# Allegro board DEV_SUB_AUDIO_BRD_V1_1-20170606-163.brd
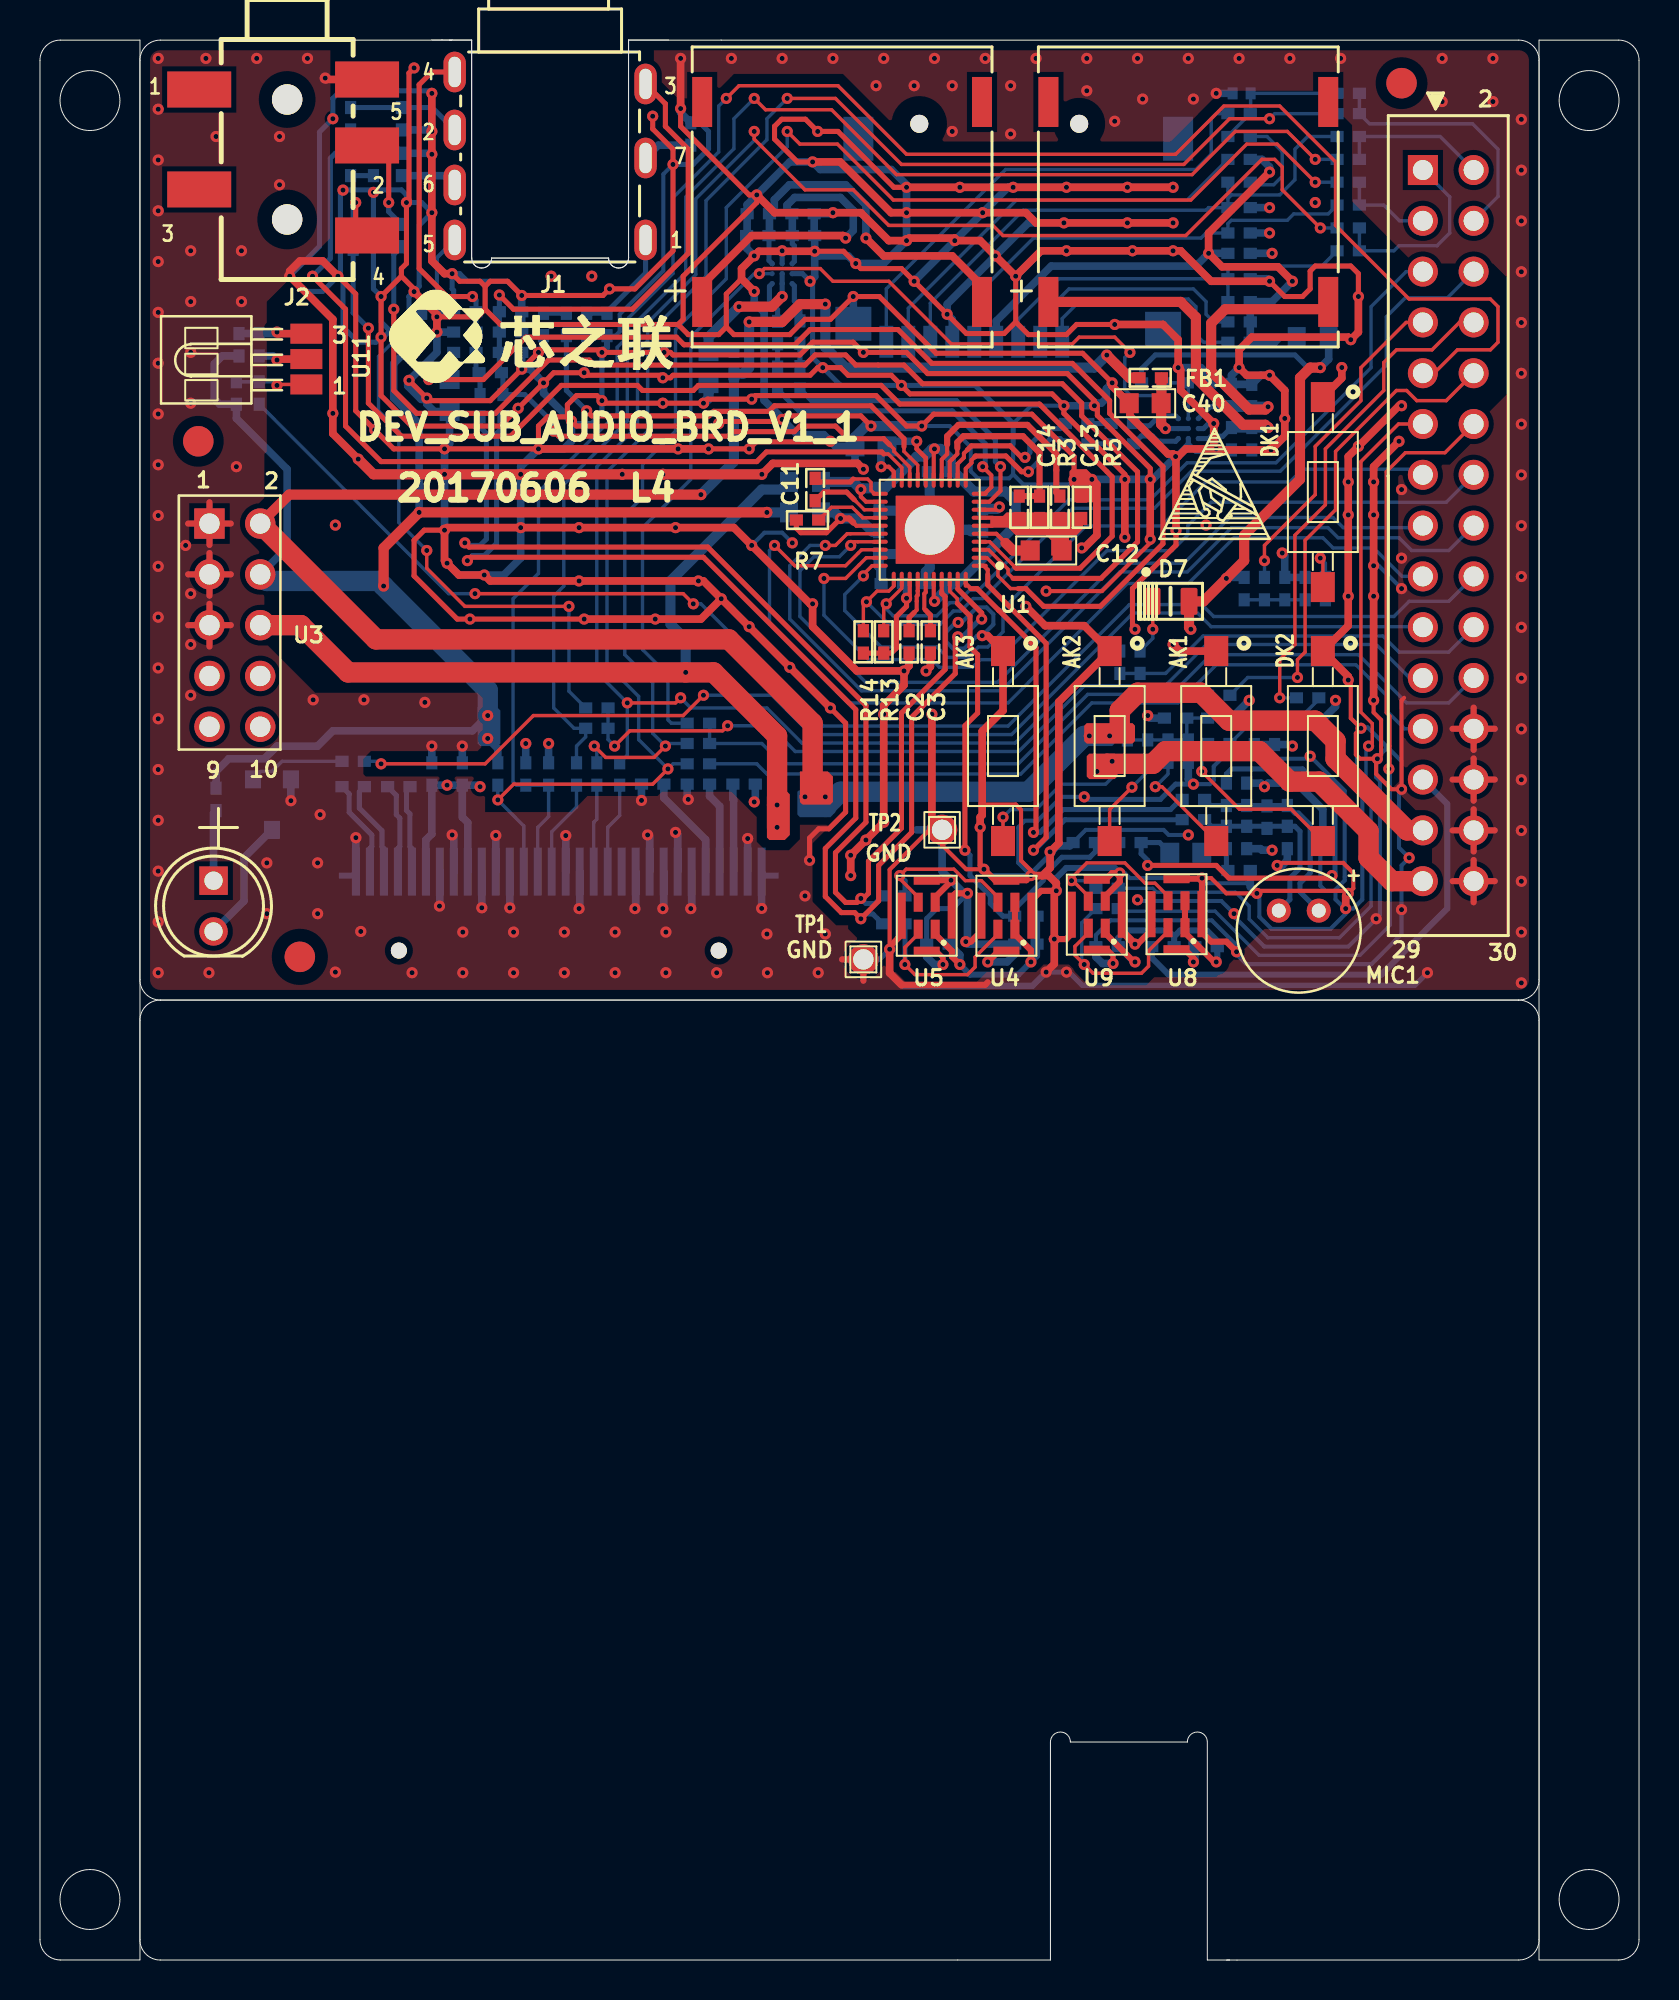
[diagram p0: board, top side]
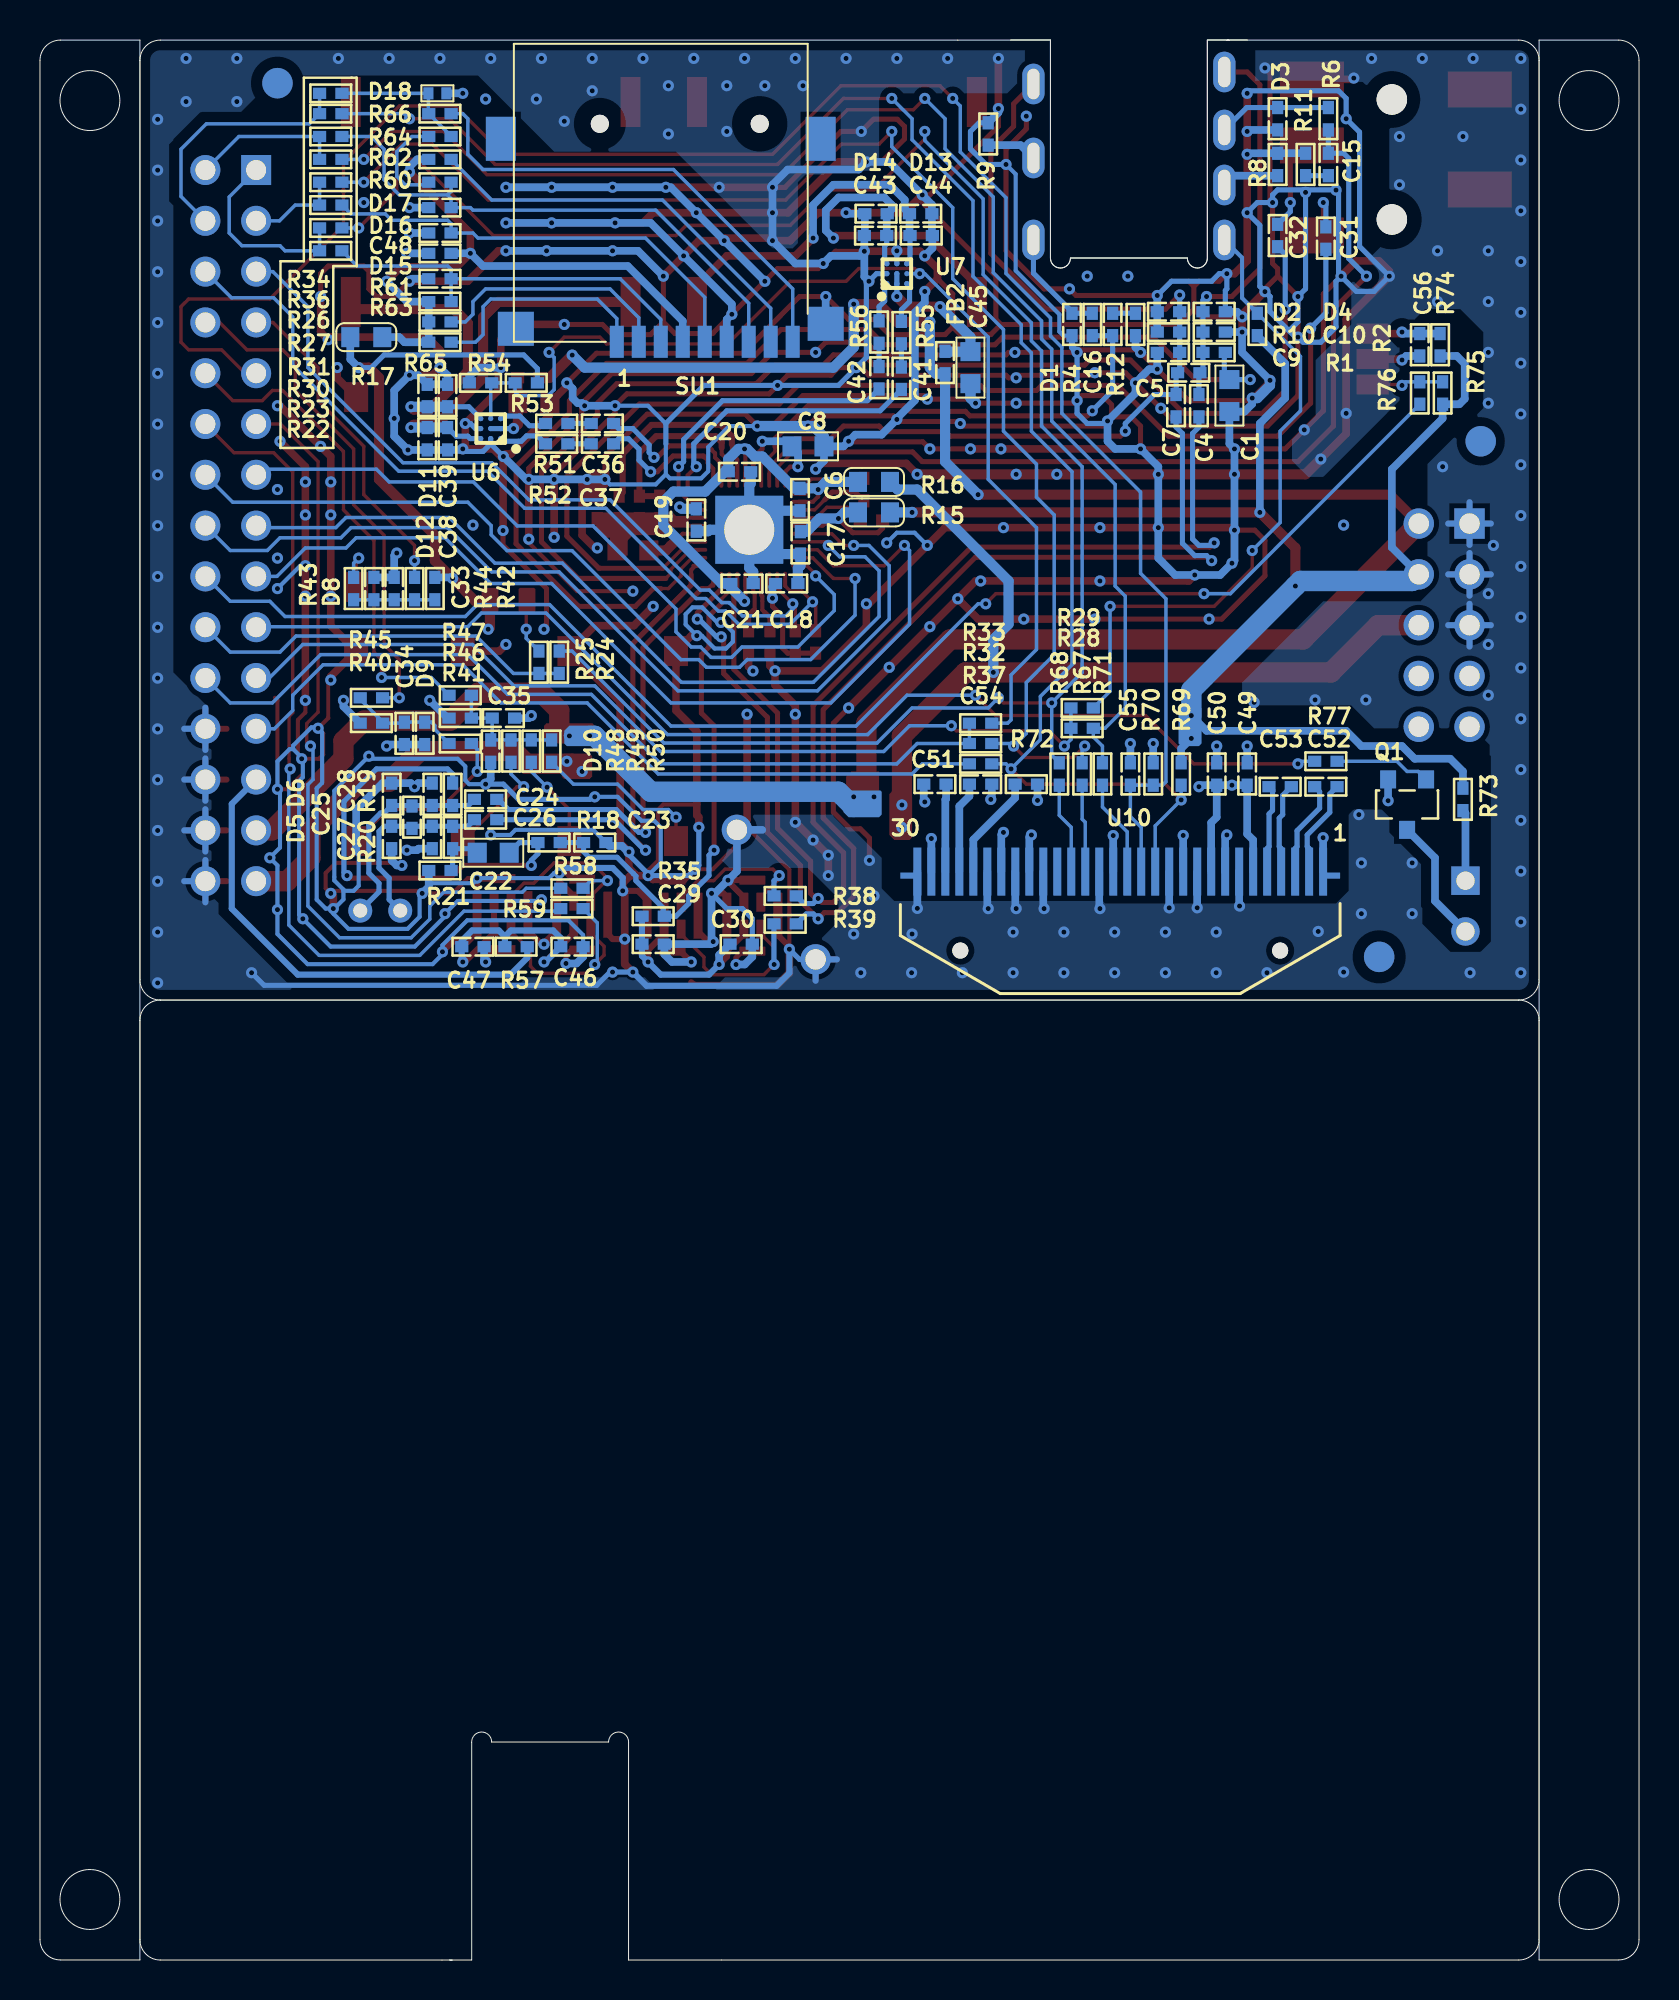
[diagram p1: board, bottom side, seen from below]

Outline 80 x 96.01 mm; copper layers: TOP, GND02, PWR03, BOTTOM. Coordinates in mm from the lower left corner of the outline.
Outline path: circle c2.5,92.98 r1.5 ; circle c2.5,3.03 r1.5 ; circle c77.5,92.98 r1.5 ; circle c77.5,3.03 r1.5 ; 0,94.99 0,1.02 arc(0.3,0.3) 1.02,0 5,0 5,96 1.02,96 arc(0.3,95.71) 0,94.99 ; 5,94.99 5,49.02 arc(5.3,48.3) 6.02,48 73.98,48 arc(74.7,48.3) 75,49.02 75,94.99 arc(74.7,95.71) 73.98,96 29.45,96 29.45,85.1 arc(28.95,84.6) 28.45,85.1 22.6,85.1 arc(22.1,84.6) 21.6,85.1 21.6,96 20.49,96 20.62,96 6.02,96 arc(5.3,95.71) 5,94.99 ; 5,46.98 5,1.02 arc(5.3,0.3) 6.02,0 50.55,0 50.55,10.9 arc(51.05,11.4) 51.55,10.9 57.4,10.9 arc(57.9,11.4) 58.4,10.9 58.4,0 59.51,0 59.38,0 73.98,0 arc(74.7,0.3) 75,1.02 75,46.98 arc(74.7,47.7) 73.98,48 6.02,48 arc(5.3,47.7) 5,46.98 ; 75,96 75,0 78.98,0 arc(79.7,0.3) 80,1.02 80,94.99 arc(79.7,95.71) 78.98,96 75,96

## Design rules (mm)
net group DIFFMIC1: nets MIC1N MIC1P
net group DIFFPAIR0: nets DMICCLK DMICDAT
net group DIFFSPOL: nets SPOLN SPOLP
net group DIFFSPOR: nets SPORN SPORP
net group N16787119: nets N16787119 N16787301
net group N16787121: nets N16787121 N16787268
net group N16787152: nets N16787152 N16787188
net group N16787225: nets N16787225 N16787227
net group N16787399: nets N16787379 N16787399
net group N16787436: nets N16787436 N16787450
net group N16812335: nets N16812333 N16812335
net group N16812341: nets N16812341 N16812343

## Placement (name value [footprint] x y rotation side)
AK1  -  [KEY-2]  58.85 60.7 270 top
AK2  -  [KEY-2]  53.51 60.7 270 top
AK3  -  [KEY-2]  48.18 60.7 270 top
C1  10uF  [C0603]  20.49 78.23 90 bottom
C2  2.2uF  [C0402]  43.48 65.91 270 top
C3  2.2uF  [C0402]  44.55 65.91 270 top
C4  NC-104  [C0402]  22.02 77.72 90 bottom
C5  33pF  [C0402]  22.53 79.37 180 bottom
C6  2.2uF  [C0402]  41.97 73.03 270 bottom
C7  NC-104  [C0402]  23.16 77.72 90 bottom
C8  10uF  [C0603]  41.58 75.69 180 bottom
C9  NC/33pF  [C0402]  23.54 80.39 180 bottom
C10  NC/33pF  [C0402]  21.26 81.4 0 bottom
C11  2.2uF  [C0402]  38.78 73.53 90 top
C12  10uF  [C0603]  50.34 70.48 180 top
C13  1uF  [C0402]  51.02 72.64 90 top
C14  4.7uF  [C0402]  48.99 72.64 270 top
C15  104  [C0402]  15.54 89.79 90 bottom
C16  104  [C0402]  26.34 81.78 270 bottom
C17  1uF  [C0402]  41.96 70.86 90 bottom
C18  1uF  [C0402]  42.64 68.83 0 bottom
C19  1uF  [C0402]  47.16 72.01 90 bottom
C20  1uF  [C0402]  45 74.42 0 bottom
C21  1uF  [C0402]  44.88 68.83 0 bottom
C22  10uF  [C0603]  57.32 55.37 180 bottom
C23  1uF  [C0402]  52.24 55.88 0 bottom
C24  104  [C0402]  57.7 58.04 0 bottom
C25  10pF  [C0402]  61.39 57.15 90 bottom
C26  104  [C0402]  57.7 57.02 0 bottom
C27  33pF  [C0402]  60.37 56.13 90 bottom
C28  33pF  [C0402]  60.37 58.29 270 bottom
C29  10uF  [C0402]  49.32 50.8 0 bottom
C30  104  [C0402]  44.92 50.8 0 bottom
C31  1uF  [C0402]  15.67 86.1 270 bottom
C32  1uF  [C0402]  18.08 86.23 270 bottom
C33  104  [C0402]  62.28 68.58 270 bottom
C34  104  [C0402]  61.77 61.34 90 bottom
C35  104  [C0402]  56.82 62.1 0 bottom
C36  104  [C0402]  51.86 76.83 180 bottom
C37  104  [C0402]  51.86 75.82 180 bottom
C38  22pF  [C0402]  59.61 76.07 90 bottom
C39  22pF  [C0402]  59.61 78.23 270 bottom
C40  10uF  [C0603]  55.29 77.85 0 top
C41  104  [C0402]  36.9 79.09 270 bottom
C42  104  [C0402]  38.02 79.12 270 bottom
C43  22pF  [C0402]  38.2 86.23 180 bottom
C44  22pF  [C0402]  35.91 86.23 0 bottom
C45  10uF  [C0603]  33.45 79.63 90 bottom
C46  10uF  [C0402]  53.39 50.67 0 bottom
C47  104  [C0402]  58.34 50.67 0 bottom
C48  104  [C0402]  59.99 85.34 180 bottom
C49  1uF-NC  [C0402]  19.6 59.31 270 bottom
C50  1uF-NC  [C0402]  21.13 59.31 270 bottom
C51  4.7uF-NC  [C0402]  35.23 58.8 180 bottom
C52  1uF-NC  [C0402]  15.67 58.67 180 bottom
C53  1uF-NC  [C0402]  17.95 58.67 180 bottom
C54  4.7uF-NC  [C0402]  32.94 58.8 0 bottom
C55  4.7uF-NC  [C0402]  25.45 59.31 270 bottom
C56  104  [C0402]  10.97 80.77 90 bottom
CN1  Speaker  [SPK_SMD]  57.45 88.16 90 top
CN2  Speaker  [SPK_SMD]  40.13 88.16 90 top
D1  AU0511P1  [C0402]  28.37 81.78 270 bottom
D2  AU0511P1  [C0402]  23.54 82.42 0 bottom
D3  AU0511P1  [C0402]  18.08 92.07 270 bottom
D4  AU0511P1  [C0402]  21.26 82.42 180 bottom
D5  AU0511P1  [C0402]  62.4 56.13 270 bottom
D6  AU0511P1  [C0402]  62.4 58.29 90 bottom
D7  RED  [LED0805]  56.56 67.94 0 top
D8  ESD9B5VL-2/TR  [C0402]  63.29 68.58 90 bottom
D9  ESD9B5VL-2/TR  [C0402]  60.75 61.34 270 bottom
D10  ESD9B5VL-2/TR  [C0402]  57.45 60.45 270 bottom
D11  AU0511P1  [C0402]  60.63 78.23 90 bottom
D12  AU0511P1  [C0402]  60.63 76.07 270 bottom
D13  AU0511P1  [C0402]  35.94 87.32 180 bottom
D14  AU0511P1  [C0402]  38.17 87.32 0 bottom
D15  ESD9B5VL-2/TR  [C0402]  59.99 84.07 0 bottom
D16  ESD9B5VL-2/TR  [C0402]  59.99 86.36 0 bottom
D17  ESD9B5VL-2/TR  [C0402]  59.99 87.63 0 bottom
D18  ESD9B5V-2/TR  [TVS0402]  60.12 93.34 180 bottom
D19  IR_TX  [IR-LED]  8.68 53.97 0 top
DK1  -  [KEY-2]  64.18 73.4 270 top
DK2  -  [KEY-2]  64.18 60.7 270 top
FB1  600R-100M  [L0402]  55.55 79.12 180 top
FB2  600R-100M  [L0402]  34.72 79.88 270 bottom
J1  A_JACK  [HP_JACK]  25.45 96.01 0 top
J2  JACK  [PJ327F]  12.37 96.03 270 top
MIC1  Micphone  [MIC_600X270]  62.23 52.47 0 top
NOREF  -  [unnamed]  13 50.16 0 top
NOREF#2  -  [#2]  73.88 48 0 top
NOREF#3  -  [#2]  5 0 90 top
NOREF#4  -  [#2]  0 14.06 0 top
NOREF#5  -  [#2]  75 4.33 0 top
NOREF#6  -  [#2]  5 0 0 top
NOREF#7  -  [unnamed]  68.12 93.85 0 top
NOREF#8  -  [#2]  2.9 94.43 0 top
NOREF#9  -  [#2]  5 3.45 0 top
NOREF#10  -  [#2]  5 48 90 top
NOREF#11  -  [#2]  5 1.02 0 top
NOREF#12  -  [unnamed]  7.92 75.94 0 top
NOREF#13  -  [unnamed]  13 50.16 180 bottom
NOREF#14  -  [unnamed]  7.92 75.94 180 bottom
NOREF#15  -  [unnamed]  68.12 93.85 180 bottom
Q1  BSN20  [SOT-23]  11.6 57.78 270 bottom
R1  2k  [R0402]  21.26 80.39 180 bottom
R2  100k  [R0402]  19.1 81.78 270 bottom
R3  220K 1%  [R0402]  50.01 72.64 90 top
R4  0R  [R0402]  27.35 81.78 270 bottom
R5  0R 1%  [R0402]  52.12 72.64 270 top
R6  0R  [R0402]  15.54 92.07 270 bottom
R7  2k  [R0402]  38.4 72.01 0 top
R8  0R  [R0402]  18.08 89.79 270 bottom
R9  0R  [R0402]  32.56 91.31 270 bottom
R10  0R  [R0402]  23.54 81.4 180 bottom
R11  22R  [R0402]  16.68 89.79 270 bottom
R12  22R  [R0402]  25.19 81.78 90 bottom
R13  2k  [R0402]  42.21 65.91 90 top
R14  2k  [R0402]  41.19 65.91 90 top
R15  0R  [R0603]  38.27 72.39 180 bottom
R16  0R  [R0603]  38.27 73.91 180 bottom
R17  0R  [R0603]  63.67 81.15 180 bottom
R18  1K  [R0402]  54.53 55.88 0 bottom
R19  1K5  [R0402]  59.36 58.29 90 bottom
R20  1K5  [R0402]  59.36 56.13 90 bottom
R21  1K  [R0402]  59.99 54.48 180 bottom
R22  0R  [R0402]  65.45 85.47 0 bottom
R23  0R  [R0402]  65.45 86.61 0 bottom
R24  NC-0R  [R0402]  54.02 64.89 270 bottom
R25  NC-2K  [R0402]  55.04 64.89 270 bottom
R26  0R  [R0402]  65.45 91.18 0 bottom
R27  0R  [R0402]  65.45 90.04 0 bottom
R28  NC-0R  [R0402]  27.86 61.59 0 bottom
R29  0R  [R0402]  27.86 62.61 0 bottom
R30  0R  [R0402]  65.45 87.75 0 bottom
R31  0R  [R0402]  65.45 88.9 0 bottom
R32  NC-0R  [R0402]  32.94 60.83 0 bottom
R33  NC-0R  [R0402]  32.94 61.85 0 bottom
R34  0R  [R0402]  65.45 93.34 0 bottom
R35  0R  [R0402]  49.32 52.19 180 bottom
R36  0R  [R0402]  65.45 92.33 0 bottom
R37  NC-0R  [R0402]  32.94 59.81 0 bottom
R38  0R  [R0402]  42.72 53.21 0 bottom
R39  0R  [R0402]  42.72 51.81 0 bottom
R40  10K-NC  [R0402]  63.42 61.85 180 bottom
R41  0R  [R0402]  58.97 60.83 180 bottom
R42  10K-NC  [R0402]  60.24 68.58 270 bottom
R43  0R  [R0402]  64.31 68.58 90 bottom
R44  0R-NC  [R0402]  61.26 68.58 270 bottom
R45  0R-NC  [R0402]  63.42 63.12 0 bottom
R46  10K  [R0402]  58.97 62.1 0 bottom
R47  0R-NC  [R0402]  58.97 63.24 0 bottom
R48  1k8  [R0402]  56.43 60.45 90 bottom
R49  4k7  [R0402]  55.42 60.45 90 bottom
R50  10K  [R0402]  54.4 60.45 90 bottom
R51  51K  [R0402]  54.15 76.83 180 bottom
R52  51K  [R0402]  54.15 75.82 180 bottom
R53  NC-0R  [R0402]  55.67 78.86 180 bottom
R54  100k  [R0402]  57.96 78.86 180 bottom
R55  51K  [R0402]  36.9 81.38 270 bottom
R56  51K  [R0402]  38.02 81.4 270 bottom
R57  0R  [R0402]  56.18 50.67 180 bottom
R58  0R  [R0402]  53.39 53.59 180 bottom
R59  0R  [R0402]  53.39 52.57 180 bottom
R60  10K  [R0402]  59.99 88.9 180 bottom
R61  10K  [R0402]  59.99 82.93 180 bottom
R62  10K  [R0402]  59.99 90.04 180 bottom
R63  10K  [R0402]  59.99 81.91 180 bottom
R64  47K  [R0402]  59.99 91.18 180 bottom
R65  10K  [R0402]  59.99 80.9 180 bottom
R66  NC-0R  [R0402]  59.99 92.33 180 bottom
R67  100R-NC  [R0402]  27.86 59.31 270 bottom
R68  100R-NC  [R0402]  29 59.31 270 bottom
R69  10K-NC  [R0402]  22.91 59.31 270 bottom
R70  10K-NC  [R0402]  24.3 59.31 270 bottom
R71  100R-NC  [R0402]  26.84 59.31 270 bottom
R72  910K-NC  [R0402]  30.65 58.8 180 bottom
R73  1K  [R0402]  8.81 58.04 90 bottom
R74  33R  [R0402]  9.95 80.77 270 bottom
R75  10K  [R0402]  9.83 78.36 270 bottom
R76  0R-NC  [R0402]  10.97 78.36 270 bottom
R77  1K  [R0402]  15.67 59.94 0 bottom
SU1  MICROSD/TF_SLOT  [TF9P]  48.94 91.82 0 bottom
TP1  GND  [TP_PAD]  41.19 50.03 0 top
TP2  GND  [TP_PAD]  45.13 56.51 0 top
U1  AC100  [QFN40P0_40B5_00X5_00H0_75]  44.51 71.52 180 top
U2  DIP-30  [IDC-30]  70.46 71.73 270 top
U3  DIP-10  [IDC-10]  9.75 66.75 0 top
U4  NSM0411DT-BL-ZR  [SON8P0_6B4_0X3_0H1_0]  48.35 52.22 0 top
U5  NSM0411DT-BL-ZR  [SON8P0_6B4_0X3_0H1_0]  44.36 52.22 0 top
U6  AW8010CSR  [BGA9P0_50B1_43X1_43H0_70]  57.45 76.58 0 bottom
U7  AW8010CSR  [BGA9P0_50B1_43X1_43H0_70]  37.13 84.32 90 bottom
U8  NSM0411DT-BL-ZR  [SON8P0_6B4_0X3_0H1_0]  56.86 52.3 0 top
U9  NSM0411DT-BL-ZR  [SON8P0_6B4_0X3_0H1_0]  52.87 52.27 0 top
U10  OLED  [LED_128X64]  25.95 54.23 0 bottom
U11  IR_RX  [IR]  10.16 74.77 90 top

## Library data of the parts
AK1-AK3 DK1 DK2 = KEY-2
C1 C4 C5 C7 C9 C10 = CAPACITOR: room: HP_JACK
C2 C3 C6 C8 C11-C14 = CAPACITOR_0: room: AC100
C15 C16 = CAPACITOR_0: room: HP_JACK
C17-C21 = CAPACITOR_0: room: POWER
C22-C28 = CAPACITOR: room: ECM-AMIC
C29 C30 C46 C47 = CAPACITOR: room: MEMS-DMIC
C31 C32 = CAPACITOR: room: LINE-IN
C33-C35 C49-C56 = CAPACITOR_0
C36-C39 = CAPACITOR: room: SPK-U4
C40 = CAPACITOR_0: room: SPK-U4
C41-C44 = CAPACITOR: room: SPK-U5
C45 = CAPACITOR_0: room: SPK-U5
C48 = CAPACITOR_0: room: site1
CN1 = SPEAKER_1: room: SPK-U4
CN2 = SPEAKER_1: room: SPK-U5
D1-D4 = 1_1.5KE100A: room: HP_JACK
D5 D6 = 1_1.5KE100A: room: ECM-AMIC
D7 = LED_1: Tolerance: RichardLC; User Part Number: LED0805
D8-D10 D18 = 1_1.5KE100A
D11 D12 = 1_1.5KE100A: room: SPK-U4
D13 D14 = 1_1.5KE100A: room: SPK-U5
D15-D17 = 1_1.5KE100A: room: site1
D19 = IR_TX
FB1 = INDUCTOR_2: room: SPK-U4
FB2 = INDUCTOR_2: room: SPK-U5
J1 = A_JACK
J2 = HP_JACK: room: LINE-IN
MIC1 = Micphone_0: room: ECM-AMIC
Q1 = NMOS_0
R1 R2 R4 R6 = R: room: HP_JACK
R3 R5 R7 R13 R14 = R: room: AC100
R8-R12 = R1 0805: room: HP_JACK
R15-R17 R22-R34 R36 R37 = R1_0805
R18-R21 = R: room: ECM-AMIC
R35 R38 R39 R57-R59 = R: room: MEMS-DMIC
R40-R50 = R1 0805
R51-R54 = R: room: SPK-U4
R55 R56 = R: room: SPK-U5
R60-R63 R65 = R: room: site1
R64 R73-R77 = R
R66 = R1_0805: room: site1
R67-R72 = R1_0805: room: DRAM
SU1 = SDMMC SLOT_11: room: site1
TP1 TP2 = T_POINT_R: room: MEMS-DMIC
U1 = AXP22x_24
U2 = DIP-30
U3 = DIP-10
U4 U5 U8 U9 = DMIC6/SMD_0: room: MEMS-DMIC
U6 = AW8010CSR: Tolerance: RichardLC; room: SPK-U4
U7 = AW8010CSR: Tolerance: RichardLC; room: SPK-U5
U10 = OLED_1
U11 = IR_Module_0

## Footprints (pads in the part's own frame, mm; a bottom-side part is the same pattern mirrored in y, then rotated)
BGA9P0_50B1_43X1_43H0_70
  round 0.26 smd: A1(-0.5,0.5) A2(0,0.5) A3(0.5,0.5) B1(-0.5,0) B2(0,0) B3(0.5,0) C1(-0.5,-0.5) C2(0,-0.5) C3(0.5,-0.5)
C0402
  rect 0.66x0.56 smd: 1(-0.56,0) 2(0.56,0)
C0603
  rect 0.95x1 smd: 1(-0.8,0) 2(0.8,0)
HP_JACK
  oval 1.118x2.032 hole 0.61x1.524: 1(4.85,-10) 2(-4.7,-4.5) 3(4.85,-2.2) 4(-4.7,-1.6) 5(-4.7,-10) 6(-4.7,-7.25) 7(4.85,-5.9)
IDC-10
  rect 1.52x1.52 hole 1.02: 1(-1.27,5.08)
  round 1.52 hole 1.02: 2(1.27,5.08) 3(-1.27,2.54) 4(1.27,2.54) 5(-1.27,0) 6(1.27,0) 7(-1.27,-2.54) 8(1.27,-2.54) 9(-1.27,-5.08) 10(1.27,-5.08)
IDC-30
  rect 1.5x1.5 hole 1: 1(-17.78,-1.27)
  round 1.5 hole 1: 2(-17.78,1.27) 3(-15.24,-1.27) 4(-15.24,1.27) 5(-12.7,-1.27) 6(-12.7,1.27) 7(-10.16,-1.27) 8(-10.16,1.27) 9(-7.62,-1.27) 10(-7.62,1.27) 11(-5.08,-1.27) 12(-5.08,1.27) 13(-2.54,-1.27) 14(-2.54,1.27) 15(0,-1.27) 16(0,1.27) 17(2.54,-1.27) 18(2.54,1.27) 19(5.08,-1.27) 20(5.08,1.27) 21(7.62,-1.27) 22(7.62,1.27) 23(10.16,-1.27) 24(10.16,1.27) 25(12.7,-1.27) 26(12.7,1.27) 27(15.24,-1.27) 28(15.24,1.27) 29(17.78,-1.27) 30(17.78,1.27)
IR
  rect 1x1.6 smd: 1(4.01,-3.17) 2(5.28,-3.17) 3(6.55,-3.17)
IR-LED
  rect 1.422x1.422 hole 0.914: 1(0,0)
  round 1.422 hole 0.914: 2(0,-2.54)
KEY-2
  rect 1.5x1.2 smd: 1(-4.75,0) 2(4.75,0)
L0402
  rect 0.66x0.56 smd: 1(-0.56,0) 2(0.56,0)
LED0805
  custom 0.84x1.34 smd: A(0.925,0) C(-0.925,0)
LED_128X64
  round 0.8 hole 0.8 unplated: (-8,3.75) (8,3.75)
  rect 0.4x2.4 smd: 1(-10.15,-0.2) 2(-9.45,-0.2) 3(-8.75,-0.2) 4(-8.05,-0.2) 5(-7.35,-0.2) 6(-6.65,-0.2) 7(-5.95,-0.2) 8(-5.25,-0.2) 9(-4.55,-0.2) 10(-3.85,-0.2) 11(-3.15,-0.2) 12(-2.45,-0.2) 13(-1.75,-0.2) 14(-1.05,-0.2) 15(-0.35,-0.2) 16(0.35,-0.2) 17(1.05,-0.2) 18(1.75,-0.2) 19(2.45,-0.2) 20(3.15,-0.2) 21(3.85,-0.2) 22(4.55,-0.2) 23(5.25,-0.2) 24(5.95,-0.2) 25(6.65,-0.2) 26(7.35,-0.2) 27(8.05,-0.2) 28(8.75,-0.2) 29(9.45,-0.2) 30(10.15,-0.2)
MIC_600X270
  round 1.2 hole 0.7: 1(1.75,0) 2(-0.25,0)
PJ327F
  round 1.52 hole 1.6 unplated: (3,0) (9,0)
  rect 1.8x3.2 smd: 1(2.5,-4.4) 2(5.3,4) 3(7.5,-4.4) 4(9.8,4) 5(2,4)
QFN40P0_40B5_00X5_00H0_75
  custom 0.8x0.2 smd: 1(-2.5,1.8) 2(-2.5,1.4) 3(-2.5,1) 4(-2.5,0.6) 5(-2.5,0.2) 6(-2.5,-0.2) 7(-2.5,-0.6) 8(-2.5,-1) 9(-2.5,-1.4) 10(-2.5,-1.8) 21(2.5,-1.8) 22(2.5,-1.4) 23(2.5,-1) 24(2.5,-0.6) 25(2.5,-0.2) 26(2.5,0.2) 27(2.5,0.6) 28(2.5,1) 29(2.5,1.4) 30(2.5,1.8)
  custom 0.2x0.8 smd: 11(-1.8,-2.5) 12(-1.4,-2.5) 13(-1,-2.5) 14(-0.6,-2.5) 15(-0.2,-2.5) 16(0.2,-2.5) 17(0.6,-2.5) 18(1,-2.5) 19(1.4,-2.5) 20(1.8,-2.5) 31(1.8,2.5) 32(1.4,2.5) 33(1,2.5) 34(0.6,2.5) 35(0.2,2.5) 36(-0.2,2.5) 37(-0.6,2.5) 38(-1,2.5) 39(-1.4,2.5) 40(-1.8,2.5)
  rect 3.4x3.4 hole 2.5: 41(0,0)
R0402
  rect 0.66x0.56 smd: 1(-0.56,0) 2(0.56,0)
R0603
  rect 0.9x1 smd: 1(-0.8,0) 2(0.8,0)
SON8P0_6B4_0X3_0H1_0
  rect 0.45x0.95 smd: 1(0.425,-0.675) 2(0.425,0.675) 3(-0.425,0.675) 4(-0.425,-0.675)
  rect 1.3x0.45 smd: 5(0,-1.775) 7(0,1.775)
  rect 0.45x2.3 smd: 6(1.275,0) 8(-1.275,0)
SOT-23
  rect 0.9x0.8 smd: 1(-1.254,0.95) 2(-1.254,-0.95) 3(1.27,0)
SPK_SMD
  rect 2.5x1 smd: (4.75,7) (4.75,-7) 1(-5.25,-7) 2(-5.25,7)
TF9P
  rect 1.5x2.2 smd: (-8,0.75) (8,0.75)
  round 0.9 hole 0.9 unplated: (-4.95,0) (3.05,0)
  rect 1.8x1.7 smd: (7.25,10.25) 10(-8.25,10)
  rect 0.7x1.6 smd: 1(2.2,10.9) 2(1.1,10.9) 3(0,10.9) 4(-1.1,10.9) 5(-2.2,10.9) 6(-3.3,10.9) 7(-4.4,10.9) 8(-5.5,10.9) 9(-6.6,10.9)
TP_PAD
  round 1.52 hole 1.02: 1(0,0)
TVS0402
  rect 0.5x0.6 smd: 1(-0.45,0) 2(0.45,0)
unnamed
  round 1.524 smd: 1(0,0)

## Nets
AVCC: C17.2 C18.2 C19.2 R7.1 R13.1 R14.1 R15.1 U1.8(AVCC) U1.25(VCC-IO0) U1.33(VCC-IO1)
GND: AK1.1 AK2.1 AK3.1 C1.1 C2.2 C3.2 C6.2 C8.2 C9.1 C10.1 C17.1 C18.1 C19.1 C20.1 C21.1 C23.1 C27.1 C28.1 C29.1 C30.1 C33.1 C34.1 C35.1 C38.1 C39.1 C40.1 C43.1 C44.1 C45.1 C46.1 C47.1 C48.1 C49.1 C50.1 C51.1 C54.1 C55.1 C56.1 D1.2(CATHODE) D2.2(CATHODE) D3.2(CATHODE) D4.2(CATHODE) D5.2(CATHODE) D6.2(CATHODE) D8.2(CATHODE) D9.2(CATHODE) D10.2(CATHODE) D11.2(CATHODE) D12.2(CATHODE) D13.2(CATHODE) D14.2(CATHODE) D15.2(CATHODE) D16.2(CATHODE) D17.2(CATHODE) D18.2(CATHODE) DK1.1 DK2.1 J2.5(A) Q1.2(SOURCE) R5.1 R8.1 R9.1 R10.1 R11.1 R12.1 R21.1 R54.1 R72.2 SU1.6(VSS2) SU1.10(GND) TP1.1(TP) TP2.1(TP) U1.41(GND) U2.24 U2.26 U2.28 U2.30 U3.1 U3.3 U3.5 U4.5(GND1) U4.6(GND2) U4.7(GND3) U4.8(GND4) U5.2(L/R) U5.5(GND1) U5.6(GND2) U5.7(GND3) U5.8(GND4) U6.A2(GND0) U6.B3(GND1) U7.A2(GND0) U7.B3(GND1) U8.5(GND1) U8.6(GND2) U8.7(GND3) U8.8(GND4) U9.2(L/R) U9.5(GND1) U9.6(GND2) U9.7(GND3) U9.8(GND4) U10.1(NC1) U10.7(NC2) U10.8(VSS) U10.10(NC3) U10.11(BS1) U10.12(BS2) U10.16(R/W) U10.17(E/RD) U10.21(D3) U10.22(D4) U10.23(D5) U10.24(D6) U10.25(D7) U10.29(NC4) U10.30(NC5) U11.2(GND)
VCC-1V8: R16.2 U2.29 U3.6
VCC-3V3: C49.2 C50.2 D7.A(ANODE) R2.2 R15.2 R17.1 R40.1 R42.1 R46.2 R53.2 R57.2 R69.1 R70.1 R73.2 R74.2 R75.2 U2.25 U3.4 U10.6(VBAT) U10.9(VDD)
VCC-5V: FB1.2 FB2.2 U2.27 U3.2
VCC-CARD: C48.2 R17.2 R61.1 R62.1 R63.1 R65.1 SU1.4(VDD)
AKEY: R47.2 U2.10
CPVDD: C6.1 C20.2 C21.2 R16.1 U1.15(VPP) U1.22(CPVDD) U1.36(LDOIN)
DKEY1: R44.1 U2.7
DKEY2: R45.1 U2.8
DMIC_CLK: R58.1 U2.11
DMIC_DATA: R59.1 U2.12
DMICCLK: C4.1 R38.1 U1.37(MIC2P/DMICCLK)
DMICDAT: C7.1 R39.1 U1.39(MIC2N/DMICDAT)
HBIAS: C1.2 R1.2 U1.2(HBIAS)
HPOUTFB: C5.1 C7.2 C9.2 D2.1(ANODE) J1.3 R10.2 U1.18(HPOUTFB)
HPOUTL: C16.2 R4.2 U1.17(HPOUTL)
HPOUTR: C15.2 R6.2 U1.19(HPOUTR)
HS-MIC: C4.2 C5.2 C10.2 D4.1(ANODE) J1.4 R1.1
I2S_BCLK: U1.29(BCLK1) U2.14
I2S_DI: U1.27(SDOUT1) U2.15
I2S_DO: U1.26(SDIN1) U2.16
I2S_LRCLK: U1.28(LRCK1) U2.17
I2S_MCLK: U1.30(MCLK1) U2.13
IR-RX: R76.2 U2.18
IR-TX: R77.2 U2.19
IRQ-AUDIO: R7.2 U1.24(IRQ)
JDET: J1.5 R2.1 R29.1
LINEINL: C31.2 U1.4(LINEINL)
LINEINR: C32.2 U1.3(LINEINR)
MBIAS: C23.2 R18.1 R35.2 U1.38(MBIAS)
MIC1N: C26.1 U1.1(MIC1N)
MIC1P: C24.1 U1.40(MIC1P)
PA0: R22.2 R23.2 U2.1
PA1: R26.2 R27.2 U2.2
PA2: R30.2 R31.2 U2.3
PA3: R34.2 R36.2 U2.4
PA19: R24.2 R25.2 U2.20
PA20: R28.2 R29.2 U2.21
PA21: R32.2 R33.2 U2.22
PA22: R37.2 U2.23
PA-SHDN: R33.1 R53.1 R54.2 U6.C2(NSD) U7.C2(NSD)
RESET: C55.2 R70.2 U2.9 U10.14(RESET)
SD-CLK: D16.1(ANODE) R30.1 SU1.5(CLK)
SD-CMD: D15.1(ANODE) R22.1 R61.2 SU1.3(CMD)
SD-DATA0: D17.1(ANODE) R26.1 R60.2 SU1.7(DAT0)
SD-DET: D18.1(ANODE) R34.1 R64.2 R66.1
SPI1-CLK: R31.1 R32.1 R67.1
SPI1-CS0: R36.1 R37.1 R69.2 U10.13(CS)
SPI1-MISO: R27.1 R28.1 R71.1
SPI1-MOSI: R23.1 R24.1 R68.1
SPOLN: C36.2 U1.12(SPOLN)
SPOLP: C37.2 U1.11(SPOLP)
SPORN: C41.2 U1.10(SPORN)
SPORP: C42.2 U1.9(SPORP)
TWI0_SCL: R13.2 U1.32(SCK) U2.5
TWI0_SDA: R14.2 U1.31(SDA) U2.6
N15969012: C12.1 C13.1 C14.2 R3.1 R5.2 U1.6(VRN) U1.7(AGND)
N15969050: C14.1 R3.2 U1.13(VRA2)
N15969220: C11.1 U1.23(CPP)
N15969224: C8.1 U1.16(VEE) U1.20(CPVEE)
N15969254: C11.2 U1.21(CPN)
N15969394: C12.2 U1.5(VRP)
N15969722: C13.2 U1.14(VRA1)
N16778267: D1.1(ANODE) J1.1 R4.1
N16778279: D3.1(ANODE) J1.2 R6.1
N16778304: C16.1 R12.2
N16778306: C15.1 R11.2
N16779575: C29.2 C30.2 R35.1 U4.1(VDD) U4.2(L/R) U5.1(VDD)
N16779577: R39.2 U4.4(DATA) U5.4(DATA)
N16779579: R38.2 U4.3(CLK) U5.3(CLK)
N16779775: C22.2 R18.2 R19.2
N16779786: C22.1 R20.1 R21.2
N16779788: C24.2 C25.2 C28.2 D6.1(ANODE) MIC1.1(+) R19.1
N16779792: C25.1 C26.2 C27.2 D5.1(ANODE) MIC1.2(-) R20.2
N16785918: C32.1 J2.2(B)
N16785920: C31.1 J2.4(D)
N16787119: C39.2 CN1.1(-) D11.1(ANODE) U6.C3(VO2)
N16787121: C44.2 CN2.1(-) D13.1(ANODE) U7.C3(VO2)
N16787152: R55.1 U7.C1(IN-)
N16787188: R56.1 U7.A1(IN+)
N16787225: C42.1 R56.2
N16787227: C41.1 R55.2
N16787229: C45.2 FB2.1 U7.B1(VDD) U7.B2(PVDD)
N16787268: C43.2 CN2.2(+) D14.1(ANODE) U7.A3(VO1)
N16787301: C38.2 CN1.2(+) D12.1(ANODE) U6.A3(VO1)
N16787324: C40.2 FB1.1 U6.B1(VDD) U6.B2(PVDD)
N16787379: R51.1 U6.C1(IN-)
N16787399: R52.1 U6.A1(IN+)
N16787436: C36.1 R51.2
N16787450: C37.1 R52.2
N16788404: C46.2 C47.2 R57.1 U8.1(VDD) U8.2(L/R) U9.1(VDD)
N16788406: R59.2 U8.4(DATA) U9.4(DATA)
N16788408: R58.2 U8.3(CLK) U9.3(CLK)
N16804148: C33.2 D8.1(ANODE) R42.2 R43.1 R44.2
N16804167: DK1.2 R43.2
N16804252: C34.2 D9.1(ANODE) R40.2 R41.1 R45.2
N16804271: DK2.2 R41.2
N16808923: R60.1 R64.1
N16812181: R67.2 U10.18(D0)
N16812183: R68.2 U10.19(D1)
N16812293: C54.2 U10.27(VCOM)
N16812303: R72.1 U10.26(IREF)
N16812329: C51.2 U10.28(VCC)
N16812333: C52.2 U10.2(C2P)
N16812335: C52.1 U10.3(C2N)
N16812341: C53.2 U10.4(C1P)
N16812343: C53.1 U10.5(C1N)
N16812349: R71.2 U10.15(D/C)
N16833864: C56.2 R74.1 U11.3(VCC)
N16833866: R75.1 R76.1 U11.1(OUT)
N16833898: D19.2 Q1.3(DRAIN)
N16833900: D19.1 R73.1
N16835930: Q1.1(GATE) R77.1
N16840291: AK1.2 R48.1
N16840665: AK2.2 R49.1
N16840727: AK3.2 R50.1
N16841036: D7.C(CATHODE) R25.1
N16845415: R66.2 SU1.9(CD#)
N16846101: R65.2 SU1.1(DAT2)
N16846106: R63.2 SU1.2(DAT3)
N16846113: R62.2 SU1.8(DAT1)
N16849635: C35.2 D10.1(ANODE) R46.1 R47.1 R48.2 R49.2 R50.2
N16850084: J1.7 R9.2
N16850111: J1.6 R8.2
N159690300: C2.1 U1.34(BYPASS)
N1596935626: C3.1 U1.35(VDD-CORE)

Pads without a net: J2 1 3; NOREF 1; NOREF#7 1; NOREF#12 1; NOREF#13 1; NOREF#14 1; NOREF#15 1; U3 7 8 9 10; U10 20

## Via types
v1: diameter 0.559, hole 0.254, TOP to BOTTOM, 469 vias

## Routing (per net, layer and track width the routed paths; a pad name or vN(x,y) marks a point on that pad's centre or on a via; arc(x,y) is an arc through that point)
AVCC: length 30.1
  TOP w0.203: v1(43.35,68.09) 43.51,68.25 U1.33 ; 40.69,71.88 40.85,71.72 U1.25 ; U1.8 47.85,72.52 v1(48,72.66)
  TOP w0.254: v1(43.35,68.09) 43.35,67.69 42.85,67.18 42.85,65.6 42.59,65.35 R13.1 R14.1 ; R7.1 37.84,71.6 38.07,71.37 39.34,71.37 v1(40.05,72.08)
  TOP w0.305: 40.69,71.88 40.48,72.08 v1(40.05,72.08)
  PWR03 w0.508: 43.35,68.45 42.08,69.72 42.08,71.37 41.37,72.08 v1(40.05,72.08) ; 43.35,68.45 44.24,69.34 46.4,69.34 48,70.93 v1(48,72.66) ; 43.35,68.45 v1(43.35,68.09)
  BOTTOM w0.305: 47.9,72.57 v1(48,72.66)
  BOTTOM w0.381: v1(43.35,68.09) 43.35,68.68 C18.2
  BOTTOM w0.508: C17.2 41.65,71.42 40.99,72.08 v1(40.05,72.08) 39.75,72.39 R15.1 ; C19.2 47.9,72.57
GND: length 1386.3
  TOP w0.203: v1(49.58,54.23) 49.58,54.48 49.08,54.97 49.08,57.51 48.81,57.78 47.14,57.78 ; v1(66.91,60.07) 66.04,60.07 65.83,60.27 65.83,61.34 v1(66.09,61.59) 65.58,62.1 65.58,63.88 v1(65.45,64) ; v1(66.91,60.07) 66.85,60.01 66.85,59.31 67.61,58.54 v1(68.12,58.54) 68.12,62.99 68.25,63.12 ; v1(66.91,60.07) 67.1,60.26 67.1,60.71 67.1,62.01 66.72,62.38 v1(66.72,62.99) ; 58.13,54.05 58.13,54.1 v1(58.14,54.1) 58.59,54.1 59.36,53.34 v1(60.88,53.34) 61.01,53.46 65.32,53.46 v1(65.45,53.34) 65.71,53.59 65.71,54.35 65.2,54.86 62.02,54.86 v1(61.9,54.73) ; v1(47.23,54.54) 46.34,54.54 45.13,55.75 TP2.1 44.5,56.51 42.51,54.52 42.51,50.67 ; v1(50.34,68.45) 53.13,68.45 55.55,70.87 v1(55.55,71.05)
  TOP w0.254: v1(32.05,92.58) 32.05,91.69 35.48,88.26 v1(35.86,88.26) 35.86,87.88 32.18,84.2 32.18,82.04 31.92,81.78 ; v1(14.91,84.2) 15.79,83.31 15.79,77.47 v1(16.75,76.51) 17.7,75.56 v1(20.24,75.56) v1(24.94,75.56) 24.94,76.7 25.4,77.16 26.39,77.16 ; 48.81,81.91 48.23,81.33 46.35,81.33 v1(45.39,82.29) v1(43.73,83.94) 43.1,84.58 41.07,84.58 v1(40.81,84.83) 40.2,85.44 v1(38.76,85.44) ; 48.81,81.91 49.45,81.28 51.35,81.28 51.86,81.78 v1(53.77,81.78) ; 48.81,81.91 v1(48.81,84.2) ; U5.5 44.85,50.44 45.18,50.12 v1(45.18,49.78) ; v1(61.51,83.94) 62.28,83.18 63.17,83.18 63.55,83.56 63.55,84.45 63.8,84.71 65.58,84.71 65.96,84.32 v1(65.96,83.18) ; 22.27,82.55 22.27,83.69 ; 22.27,82.55 21.89,82.17 v1(19.86,82.17) ; 22.27,82.55 23.03,81.78 31.92,81.78 ; 22.27,83.69 22.53,83.94 23.39,83.94 v1(24.1,83.23) 28.17,83.23 v1(28.49,83.56) 29.76,83.56 31.67,85.47 v1(31.67,89.79) 31.67,90.55 30.65,91.56 v1(30.65,92.2) ; 22.27,83.69 22.02,83.94 21,83.94 v1(20.62,84.32) ; v1(43.35,88.64) 42.72,88.64 39.92,91.44 v1(38.91,91.44) 38.3,92.05 37.11,92.05 36.75,91.69 36.75,91.06 37.89,89.91 v1(38.65,89.91) ; v1(51.74,74.04) 51.74,75.18 49.62,77.3 44.71,77.3 v1(44.12,76.7) 43.35,76.7 41.83,78.23 35.78,78.23 v1(35.61,78.05) 33.4,78.05 v1(33.19,77.85) v1(31.16,77.85) 28.24,77.85 v1(28.11,77.97) 27.86,78.23 26.84,78.23 26.39,77.77 26.39,77.16 ; 18.08,84.2 v1(17.06,83.18) v1(17.06,81.15) 17.06,78.23 18.59,76.7 23.03,76.7 v1(23.92,77.59) v1(25.19,78.86) 25.7,79.37 v1(27.22,79.37) 27.35,79.24 31.03,79.24 v1(31.16,79.12) 31.54,79.12 31.67,79.24 38.53,79.24 38.91,79.63 v1(39.16,79.63) 40.05,79.63 40.43,79.24 42.59,79.24 v1(43.1,78.74) 43.52,78.31 50.64,78.31 v1(51.23,77.72) 51.23,77.34 54.28,74.29 v1(54.28,74.04) ; 18.08,84.2 18.08,84.58 18.33,84.83 v1(18.33,87.88) 18.46,88.01 18.46,94.36 v1(18.72,94.61) ; 18.08,84.2 18.72,83.56 v1(18.72,83.43) ; v1(55.55,74.04) 55.55,74.59 52.9,77.23 52.9,77.57 v1(52.75,77.72) 52.75,77.97 51.4,79.33 44.41,79.33 43.35,80.39 v1(41.19,80.39) 40.69,80.9 38.65,80.9 38.02,80.26 31.67,80.26 31.54,80.39 v1(31.22,80.39) v1(28.11,80.39) 27.99,80.51 25.07,80.51 v1(24.94,80.39) v1(24.1,79.55) 22.53,77.97 19.48,77.97 v1(19.35,78.1) v1(18.46,78.99) ; 26.39,77.16 v1(26.59,76.96) 26.84,76.7 33.83,76.7 v1(33.96,76.83) 34.06,76.93 37.03,76.93 v1(37.13,77.04) 37.31,77.21 41.07,77.21 v1(41.58,76.7) ; 35.1,84.07 34.34,83.31 34.34,81.66 ; U9.5 53.43,50.5 53.68,50.24 v1(53.68,49.83) ; v1(27.22,67.05) v1(21.51,67.05) 20.87,67.05 18.72,69.21 18.72,70.99 19.22,71.5 v1(20.24,71.5) ; v1(56.83,71.48) 56.83,70.75 54.66,68.58 54.66,66.67 v1(54.78,66.54) ; v1(38.5,54.99) 38.5,56.11 38.96,56.56 39.47,56.56 40.31,57.4 40.31,61.85 v1(39.54,62.61) ; v1(47.23,54.54) 47.04,54.73 v1(47.04,56.64) ; 31.92,81.78 32.43,81.28 33.96,81.28 34.34,81.66 ; v1(33.45,75.56) v1(35.48,75.56) 35.84,75.92 39.52,75.92 v1(39.54,75.94) ; v1(53.64,78.86) 52.16,80.34 44.83,80.34 41.99,83.18 v1(40.69,83.18) 39.54,82.04 38.27,82.04 37.51,81.28 34.72,81.28 34.34,81.66
  TOP w0.305: U8.8 55.58,51.47 54.91,50.8 v1(54.78,50.8) ; U9.8 51.6,51.3 51.35,51.05 v1(50.75,51.05) ; U2.24 71.73,62.62 ; U2.24 70.67,61.57 ; U2.24 71.73,60.51 ; U2.24 72.78,61.57 ; U2.28 72.78,56.49 ; U2.28 71.73,55.43 ; U2.28 70.67,56.49 ; U2.28 71.73,57.54 ; v1(46.32,50.92) 46.57,50.92 47.08,51.43 U4.8 ; U8.7 58.06,54.07 58.09,54.1 v1(58.14,54.1) ; 7.41,71.83 U3.1 ; U3.1 9.55,71.83 ; U3.1 8.48,72.89 ; U3.1 8.48,70.76 ; U2.30 72.78,53.95 ; U2.30 70.67,53.95 ; U2.30 71.73,55 ; U2.30 71.73,52.89 ; 41.19,48.97 TP1.1 40.13,50.03 ; U8.5 57.29,50.52 57.7,50.1 v1(57.7,49.91) ; v1(42.51,50.54) 42.51,50.67 43.09,51.25 U5.8 ; U3.5 9.55,66.75 ; U3.5 7.41,66.75 ; U3.5 8.48,67.81 ; U3.5 8.48,65.68 ; 71.73,57.97 U2.26 ; U2.26 70.67,59.03 ; U2.26 72.78,59.03 ; U2.26 71.73,60.08 ; U3.3 8.48,70.35 ; U3.3 8.48,68.22 ; U3.3 7.41,69.29 ; U3.3 9.55,69.29 ; v1(59.86,50.42) 59.36,50.92 58.59,50.92 58.13,51.38 U8.6 58.13,54.05 ; U5.2 44.79,53.14 45.58,53.94 v1(45.58,53.99) U5.7 ; U5.6 45.64,53.16 45.81,53.34 v1(46.4,53.34) ; v1(49.58,54.23) 49.35,53.99 U4.7 47.78,53.99 v1(47.23,54.54) ; v1(47.42,49.91) 47.95,50.44 48.35,50.44 U4.5 ; v1(50.85,53.46) 50.08,53.46 49.63,53 U4.6 ; U9.2 53.3,53.19 54.02,53.92 v1(54.02,54.35) 53.64,54.35 53.33,54.05 U9.7 ; 43.1,48.76 47.29,48.76 47.42,48.89
  TOP w0.381: J2.5 14.34,94.03 v1(14.27,94.1) ; v1(14.91,84.2) 14.14,84.96 13,84.96 12.49,84.45 v1(12.49,84.2) 14.65,82.04 v1(14.65,77.34) 14.65,76.32 v1(15.92,75.05) ; v1(56.82,75.18) 56.94,75.18 57.32,75.56 v1(58.85,75.56) ; v1(56.82,75.18) 56.69,75.31 56.44,75.31 54.53,77.21 54.53,77.81 C40.1 53.64,78.7 v1(53.64,78.86) ; v1(56.82,75.18) 56.83,75.16 v1(56.83,71.48) ; C3.2 44.55,64.67 v1(44.33,64.46) ; v1(65.13,79.63) 65.13,79.1 DK1.1 ; v1(20.62,84.32) 20.24,84.32 19.6,84.96 v1(19.6,87.37) v1(19.6,90.29) v1(19.6,91.44) v1(19.6,93.34) ; v1(61.51,83.94) 58.59,83.94 57.07,85.47 v1(56.69,85.47) v1(54.66,85.47) v1(51.35,85.47) 50.08,85.47 v1(48.81,84.2) v1(47.8,85.21) 47.04,85.98 v1(45.77,85.98) 45.77,86.1 43.48,86.1 v1(43.35,85.98) 42.46,85.98 41.07,87.37 v1(39.67,87.37) 36.75,87.37 v1(35.86,88.26) ; v1(42.51,50.54) 42.51,49.36 43.1,48.76 ; 50.15,54.23 50.47,54.23 50.85,53.84 v1(50.85,53.46) 50.75,53.36 v1(50.75,51.05) 50.75,49.81 v1(50.34,49.4) ; 50.15,54.23 50.53,54.61 v1(50.53,55.41) 50.97,55.85 50.97,62.91 AK2.1 52.25,66.72 50.29,66.72 v1(49.32,67.69) ; 50.15,54.23 v1(49.58,54.23) ; v1(56.69,86.86) v1(54.4,86.86) v1(51.23,86.86) 49.83,86.86 49.32,87.37 v1(47.16,87.37) v1(43.35,87.37) 42.58,87.37 40.04,89.91 v1(38.65,89.91) ; v1(32.05,92.58) v1(32.05,95.09) ; v1(43.23,64.46) 43.48,64.71 C2.2 ; v1(43.23,64.46) 40.87,64.46 38.65,66.67 v1(38.65,67.81) 38.53,67.81 v1(35.61,70.74) 34.72,71.62 v1(31.8,71.62) v1(26.97,71.62) v1(24.05,71.62) 20.37,71.62 v1(20.24,71.5) 20.24,69.97 v1(20.37,69.85) 20.96,69.26 v1(22.23,69.26) 22.53,68.96 v1(26.97,68.96) v1(32.94,68.96) 33.19,68.96 v1(34.08,68.07) ; v1(43.23,64.46) 43.23,63.75 42.21,62.74 v1(42.21,62.29) v1(42.21,56.89) v1(41.32,56) v1(40.56,55.24) v1(40.56,54.23) ; v1(24.94,75.56) v1(31.92,75.56) v1(33.45,75.56) ; v1(56.69,65.78) 57.02,65.45 AK1.1 ; v1(18.72,83.43) 19.86,82.28 v1(19.86,82.17) v1(19.86,81.4) ; v1(54.28,74.04) v1(54.28,71.14) ; v1(65.32,52.57) 65.32,53.21 v1(65.45,53.34) ; v1(37.13,85.47) 37.16,85.44 ; 37.16,85.44 v1(38.76,85.44) ; 37.16,85.44 35.96,85.44 v1(35.73,85.21) 35.1,84.58 35.1,84.07 v1(35.73,83.44) ; TP2.1 44.62,57.02 v1(44.62,62.29) ; v1(53.77,81.78) 56.18,81.78 56.94,81.02 v1(56.94,79.63) 57.07,79.5 57.07,78.48 v1(58.72,76.83) 58.72,75.69 v1(58.85,75.56) ; v1(58.85,75.56) 58.9,75.51 v1(61.59,75.51) 62.28,76.2 v1(62.28,77.09) 62.28,78.48 v1(61.51,79.24) 60.37,79.24 v1(59.99,79.63) 59.99,80.51 60.63,81.15 65.45,81.15 v1(65.58,81.02) 65.96,81.4 v1(65.96,83.18) ; v1(34.08,68.07) v1(35.48,66.67) v1(37.51,64.64) v1(39.54,62.61) ; v1(34.08,68.07) 33.07,67.05 v1(30.78,67.05) v1(27.22,67.05) ; v1(52.12,70.61) 52.24,70.61 52.88,71.24 52.88,73.78 v1(52.62,74.04) ; v1(47.14,66.22) 47.41,66.22 AK3.1 48.18,62.48 47.14,61.44 47.14,57.25 47.04,57.15 v1(47.04,56.64) ; U9.6 54.15,51.43 v1(54.78,50.8) ; v1(66.72,62.99) v1(66.72,68.2) v1(66.72,69.72) v1(66.72,72.26) v1(66.72,73.91) 66.72,74.67 v1(67.99,75.94) ; v1(65.45,64) 65.45,64.18 DK2.1 65.45,66.72 v1(65.45,68.2) v1(65.45,72.26) v1(65.45,73.91) 65.45,75.18 v1(65.96,75.69) 67.99,77.72 v1(68.12,77.72) ; U11.2 11.91,80.05 v1(11.86,80.01) ; v1(43.35,88.64) v1(46.02,88.64) v1(48.69,88.64) v1(51.35,88.64) v1(54.4,88.64) v1(56.69,88.64) ; v1(36.11,74.29) 36.66,74.84 40.9,74.84 v1(41.19,74.55) ; v1(55.55,71.05) v1(55.55,74.04)
  TOP w0.508: v1(36.11,74.29) v1(31.16,74.29) v1(29.13,74.29) v1(24.05,74.29) v1(20.24,74.29) 16.68,74.29 v1(15.92,75.05)
  GND02 w0.381: U2.28 72.78,56.49 ; U2.28 71.73,57.54 ; U2.28 70.67,56.49 ; U2.28 71.73,55.43 ; U3.3 8.48,70.35 ; U3.3 7.41,69.29 ; U3.3 8.48,68.22 ; U3.3 9.55,69.29 ; 8.48,65.68 U3.5 ; U3.5 7.41,66.75 ; U3.5 9.55,66.75 ; U3.5 8.48,67.81 ; 70.67,61.57 U2.24 ; U2.24 72.78,61.57 ; U2.24 71.73,62.62 ; U2.24 71.73,60.51 ; TP1.1 41.19,51.1 ; TP1.1 42.26,50.03 ; TP1.1 40.13,50.03 ; TP1.1 41.19,48.97 ; U3.1 8.48,72.89 ; U3.1 7.41,71.83 ; U3.1 9.55,71.83 ; U3.1 8.48,70.76 ; 71.73,52.89 U2.30 ; U2.30 72.78,53.95 ; U2.30 70.67,53.95 ; U2.30 71.73,55 ; 44.07,56.51 TP2.1 ; TP2.1 46.2,56.51 ; TP2.1 45.13,55.45 ; TP2.1 45.13,57.58 ; U2.26 72.78,59.03 ; U2.26 71.73,57.97 ; U2.26 71.73,60.08 ; U2.26 70.67,59.03 ; 42.51,71.52 U1.41 ; U1.41 44.51,69.51 ; U1.41 46.52,71.52 ; U1.41 44.51,73.52
  PWR03 w0.381: U3.1 8.48,72.89 ; U3.1 7.41,71.83 ; U3.1 9.55,71.83 ; U3.1 8.48,70.76 ; 40.13,50.03 TP1.1 ; TP1.1 42.26,50.03 ; TP1.1 41.19,48.97 ; TP1.1 41.19,51.1 ; U2.28 71.73,57.54 ; U2.28 72.78,56.49 ; U2.28 70.67,56.49 ; U2.28 71.73,55.43 ; U3.3 9.55,69.29 ; U3.3 7.41,69.29 ; U3.3 8.48,68.22 ; U3.3 8.48,70.35 ; 44.51,73.52 U1.41 46.52,71.52 ; 45.13,55.45 TP2.1 ; TP2.1 46.2,56.51 ; TP2.1 44.07,56.51 ; 7.41,66.75 U3.5 ; U3.5 8.48,67.81 ; U3.5 9.55,66.75 ; U3.5 8.48,65.68 ; U2.30 71.73,55 ; U2.30 72.78,53.95 ; U2.30 71.73,52.89 ; U2.30 70.67,53.95 ; 71.73,57.97 U2.26 72.78,59.03
  BOTTOM w0.203: v1(65.32,52.57) 65.27,52.57 64.82,53.03 64.82,53.46 ; v1(65.32,52.57) 65.71,52.57 66.16,53.02 66.16,58.59 65.88,58.86 65.88,61.39 v1(66.09,61.59) 66.13,61.64 66.42,61.64 67.33,60.73 67.33,60.55 ; v1(65.32,52.57) 65.32,52.32 64.56,51.56 61.61,51.56 61.01,52.16 61.01,53.21 v1(60.88,53.34) ; 67.33,60.55 66.91,60.13 v1(66.91,60.07) 66.85,60.01 66.85,59.14 67.04,58.96 67.04,52.26 v1(66.85,52.07) 65.46,50.68 61.25,50.68 59.74,52.19 v1(59.74,52.32) 59.1,52.96 54.97,52.96 v1(54.91,53.02) ; 67.33,60.55 67.51,60.55 68.12,59.94 v1(68.12,58.54) 67.99,58.42 67.99,55.62 v1(68.5,55.11) 68.12,54.73 v1(68.12,52.52) 68.12,51.3 66.61,49.8 60.36,49.8 59.86,50.29 v1(59.86,50.42) 59.86,50.75 58.62,51.99 53.56,51.99 52.83,51.25 C46.1 ; 48.69,74.29 49.2,73.78 51.48,73.78 v1(51.74,74.04) ; 48.69,74.29 48.48,74.09 46.92,74.09 46.57,74.44 46.57,75.65 45.51,76.7 v1(44.12,76.7) ; 48.69,74.29 48.69,75.82 ; 64.18,55.5 64.18,55.37 64.05,55.24 64.05,53.72 64.31,53.46 64.82,53.46 ; C23.1 52.32,56.51 56.21,56.51 56.47,56.26 v1(57.45,56.26) ; 64.82,53.46 64.82,53.53 65.27,53.98 65.27,54.15 65.27,58.47 v1(63.55,60.19) 63.42,60.07 59.1,60.07 58.72,59.69 58.72,58.99 58.53,58.8 v1(57.7,58.8) ; v1(52.24,58.16) 51.1,58.16 49.91,56.97 49.27,56.97 48.94,56.64 48.94,54.86 v1(49.58,54.23) ; v1(37.64,70.86) 37.13,71.37 36.24,71.37 v1(35.61,70.74) ; v1(54.02,54.35) 54.28,54.35 54.53,54.1 v1(58.14,54.1) 58.14,54.05 58.34,53.84 60.37,53.84 60.55,53.67 ; v1(66.72,69.72) 66.98,69.72 v1(68.12,68.58) ; 48.69,76.82 49.59,77.72 v1(51.23,77.72) ; v1(31.67,89.79) 31.19,89.3 31.19,84.48 29,82.29 29,81.43 28.8,81.22 D1.2 ; 45.81,66.88 v1(45.94,66.88) 46.12,66.88 46.87,67.64 47.36,67.64 47.7,67.3 47.7,66.78 v1(47.14,66.22) 46.89,66.22 46.25,65.58 45.68,65.58 45.34,65.92 45.34,66.41 45.81,66.88
  BOTTOM w0.254: v1(46.4,53.34) 45.64,52.57 44.86,52.57 44.36,52.08 C30.1 ; v1(47.04,56.64) 47.04,54.73 v1(47.23,54.54) 47.54,54.23 v1(49.58,54.23) 49.58,54.31 50.53,55.27 v1(50.53,55.41) ; v1(24.1,83.23) 23.39,83.94 21.38,83.94 21,84.32 v1(20.62,84.32) 20.62,83.56 20.7,83.49 D4.2 ; 17.51,81.47 17.19,81.15 v1(17.06,81.15) 16.81,80.9 15.92,80.9 15.16,81.66 15.16,83.94 v1(14.91,84.2) ; 17.51,81.47 18.46,82.42 18.46,83.17 ; 17.51,81.47 17.06,81.91 v1(17.06,83.18) 16.68,83.56 v1(16.68,88.39) ; v1(16.68,88.39) 16.56,88.52 15.16,88.52 ; v1(16.68,88.39) 16.81,88.52 18.08,88.52 18.33,88.26 v1(18.33,87.88) 19.1,87.88 v1(19.6,87.37) 18.97,86.74 18.97,83.69 18.46,83.18 18.46,83.17 ; 18.46,83.17 v1(18.72,83.43) ; U6.B3 58.21,76.58 58.47,76.83 v1(58.72,76.83) ; v1(58.85,75.56) 58.72,75.43 57.83,75.43 57.45,75.82 ; v1(14.91,84.2) 15.03,84.32 15.03,88.39 15.16,88.52 ; v1(14.91,84.2) 14.14,83.44 13.25,83.44 v1(12.49,84.2) 13.98,85.69 13.98,91.4 v1(14.65,92.07) 14.65,93.09 15.03,93.47 19.48,93.47 v1(19.6,93.34) ; U7.A2 38.15,84.32 v1(38.53,83.94) 38.65,83.82 38.65,80.13 v1(39.16,79.63) 40.05,78.74 v1(43.1,78.74) 46.78,78.74 48.69,76.83 48.69,75.82 ; v1(50.34,49.4) v1(51.35,49.4) 51.48,49.4 52.14,48.74 68.79,48.74 v1(69.41,49.37) ; 57.45,75.82 U6.A2 ; 57.45,75.82 v1(56.82,75.18) ; v1(28.11,80.39) v1(28.11,77.97) 28.11,77.34 27.61,76.83 26.72,76.83 v1(26.59,76.96) ; R9.1 33.01,91.87 33.45,91.44 33.45,90.56 32.67,89.79 v1(31.67,89.79) ; v1(42.51,50.54) 42,50.03 TP1.1 ; v1(52.24,58.16) 52.37,58.16 52.5,58.04 56.05,58.04 56.82,58.8 v1(57.7,58.8) ; 15.16,88.52 v1(15.16,88.5) ; U7.B3 v1(37.13,85.47)
  BOTTOM w0.305: U3.1 9.55,71.83 ; U3.1 8.48,70.76 ; U3.1 8.48,72.89 ; U3.1 7.41,71.83 ; v1(54.02,54.35) 53.77,54.61 51.35,54.61 50.85,54.11 v1(50.85,53.46) ; U2.28 71.73,57.54 ; U2.28 72.78,56.49 ; U2.28 71.73,55.43 ; 7.41,66.75 U3.5 ; U3.5 8.48,67.81 ; U3.5 8.48,65.68 ; U3.5 9.55,66.75 ; 40.13,50.03 TP1.1 41.19,48.97 ; 28.24,80.51 28.37,80.64 D1.2 ; 7.41,69.29 U3.3 ; U3.3 8.48,70.35 ; U3.3 9.55,69.29 ; U3.3 8.48,68.22 ; U2.26 72.78,59.03 ; U2.26 71.73,57.97 ; U2.26 71.73,60.08 ; v1(50.34,49.4) 49.65,48.71 43.15,48.71 42.51,49.36 v1(42.51,50.54) ; U2.30 72.78,53.95 ; U2.30 71.73,55 ; U2.30 71.73,52.89 ; U2.24 72.78,61.57 ; U2.24 71.73,62.62 ; U2.24 71.73,60.51
  BOTTOM w0.381: v1(56.69,85.47) v1(54.66,85.47) v1(51.35,85.47) 50.08,85.47 v1(48.81,84.2) ; C50.1 v1(21.13,60.7) ; v1(11.86,80.01) 11.66,80.21 C56.1 ; C47.1 57.78,49.98 v1(57.7,49.91) ; v1(53.68,49.83) 53.16,49.83 52.83,50.16 C46.1 ; R12.1 25.19,80.64 v1(24.94,80.39) ; C55.1 v1(25.45,60.83) ; v1(50.53,55.41) 50.59,55.41 50.89,55.71 51.52,55.71 C23.1 ; U10.23 31.2,52.62 v1(31.16,52.57) ; 43.86,56.51 TP2.1 45.13,54.44 v1(45.58,53.99) 46.24,53.34 v1(46.4,53.34) 46.4,51.01 v1(46.32,50.92) 46.45,50.8 C29.1 48.76,50.29 48.38,49.91 v1(47.42,49.91) ; C48.1 v1(61.64,85.34) ; v1(35.73,83.44) 35.73,82.88 36.23,82.39 36.23,77.99 37.13,77.09 v1(37.13,77.04) 37.89,76.27 39.21,76.27 v1(39.54,75.94) 39.8,75.69 C8.2 40.78,74.97 v1(41.19,74.55) ; v1(60.88,53.34) 60.55,53.67 R21.1 ; D17.2 v1(61.51,87.63) ; C51.1 35.79,57.96 v1(35.73,57.91) ; C28.1 61.08,58.85 v1(61.26,58.67) 61.44,58.85 D6.2 62.86,58.85 64.18,57.53 64.18,55.5 ; D18.2 v1(58.85,93.34) ; R72.2 v1(30.09,57.98) ; R54.1 58.52,79.19 58.09,79.63 v1(56.94,79.63) ; v1(45.18,49.78) 44.74,49.78 44.36,50.16 C30.1 ; U10.12 v1(23.5,52.61) ; U10.16 v1(26.31,56.23) ; U10.8 20.71,56.17 v1(20.62,56.26) ; U10.1 v1(15.8,56.12) ; v1(53.64,78.86) 53.35,78.57 53.35,78.1 53.1,77.85 52.88,77.85 v1(52.75,77.72) v1(51.23,77.72) ; v1(19.35,78.1) 19.35,77.81 19.73,77.43 C1.1 20.49,75.82 v1(20.24,75.56) v1(20.24,74.29) v1(20.24,71.5) 20.24,69.97 v1(20.37,69.85) 20.96,69.26 v1(22.23,69.26) 23.21,69.26 24.05,70.1 v1(24.05,71.62) v1(24.05,74.29) 24.05,74.67 v1(24.94,75.56) 26.21,75.56 26.59,75.94 v1(26.59,76.96) 25.19,78.36 v1(25.19,78.86) 24.89,79.17 24.89,79.17 24.51,79.55 v1(24.1,79.55) C9.1 ; D9.2 C34.1 62.58,60.78 v1(62.66,60.7) ; v1(32.56,52.57) 32.6,52.62 U10.25 ; U10.30 v1(36.11,52.58) ; C54.1 32.38,58.09 v1(32.43,58.04) ; SU1.6 45.64,82.04 v1(45.39,82.29) 45.39,82.8 v1(47.8,85.21) 49.45,86.86 v1(51.23,86.86) v1(54.4,86.86) v1(56.69,86.86) ; v1(24.1,83.23) D2.2 R10.1 ; C10.1 v1(19.86,81.4) 19.86,80.39 v1(18.46,78.99) ; v1(19.99,52.7) 20.01,52.72 U10.7 ; 28.24,80.51 v1(28.11,80.39) ; U10.21 29.8,52.61 v1(29.76,52.57) ; v1(56.82,75.18) 55.67,74.04 v1(55.55,74.04) v1(54.28,74.04) v1(52.62,74.04) v1(51.74,74.04) ; v1(59.99,79.63) 59.61,79.24 C39.1 D11.2 61.08,79.24 v1(61.51,79.24) 62.28,78.48 v1(62.28,77.09) 62.28,76.2 v1(61.59,75.51) D12.2 C38.1 58.9,75.51 v1(58.85,75.56) ; v1(61.9,54.73) 62.15,54.73 62.4,54.99 D5.2 ; U10.29 v1(35.41,56.08) ; v1(38.53,83.94) 38.76,84.17 v1(38.76,85.44) ; U10.17 27.01,52.61 v1(26.97,52.57) ; v1(62.15,70.35) 62.28,70.23 C33.1 D8.2 ; v1(61.51,83.94) 61.39,84.07 D15.2 ; C49.1 v1(19.6,60.7) ; v1(57.7,58.8) 57.45,59.05 D10.2 ; v1(38.76,85.44) 38.99,85.21 40.43,85.21 v1(40.81,84.83) 42.21,84.83 v1(43.35,85.98) v1(43.35,87.37) v1(43.35,88.64) 43.35,88.77 42.59,89.53 39.04,89.53 v1(38.65,89.91) 37.51,89.91 v1(35.86,88.26) 35.38,87.78 D13.2 35.38,86.26 C44.1 35.35,85.6 v1(35.73,85.21) ; v1(38.76,85.44) C43.1 38.73,86.26 D14.2 39.62,87.32 v1(39.67,87.37) ; D4.2 20.11,82.42 v1(19.86,82.17) ; v1(55.42,62.23) 55.55,62.1 C35.1 ; v1(56.69,88.64) v1(54.4,88.64) v1(51.35,88.64) v1(48.69,88.64) 48.43,88.64 v1(47.16,87.37) v1(45.77,85.98) v1(43.73,83.94) ; R11.1 R8.1 19.55,90.35 v1(19.6,90.29) ; U10.22 30.5,56.15 v1(30.4,56.26) ; D3.2 19.53,91.51 v1(19.6,91.44) ; v1(40.69,83.18) 40.69,83.18 SU1.10 ; U10.10 v1(22.11,52.61) ; C27.1 61.06,55.57 61.13,55.5 v1(61.64,55.5) ; D16.2 v1(61.51,86.36) ; U10.24 31.9,56.28 v1(31.8,56.38) ; v1(32.05,92.58) 32.05,92.38 R9.1 ; Q1.2 v1(12.55,57.97) ; U10.11 v1(22.8,56.23)
  BOTTOM w0.508: C19.1 46.58,71.45 46.51,71.52 U1.41 ; C45.1 33.45,78.36 33.45,78.1 v1(33.19,77.85) ; U1.41 44.51,73.77 44.44,73.84 C20.1 ; U1.41 44.09,71.52 43.14,72.47 C6.2 ; U1.41 44.51,69.61 44.32,69.41 C21.1 ; U1.41 43.3,70.3 C17.1 41.96,69.72 42.08,69.59 C18.1 ; v1(18.46,78.99) 18.46,78.74 19.1,78.1 v1(19.35,78.1) ; C8.2 40.78,76.16 41.32,76.7 v1(41.58,76.7) v1(44.12,76.7)
  vias: v1(5.91,95.09) v1(5.91,92.55) v1(5.91,90.01) v1(5.91,87.47) v1(5.91,84.93) v1(5.91,82.39) v1(5.91,79.85) v1(5.91,77.31) v1(5.91,74.77) v1(5.91,72.23) v1(5.91,69.69) v1(5.91,67.15) v1(5.91,64.61) v1(5.91,62.07) v1(5.91,59.53) v1(5.91,56.99) v1(5.91,54.45) v1(5.91,51.91) v1(5.91,49.37) v1(7.29,70.74) v1(7.54,85.47) v1(7.54,82.93) v1(7.54,80.39) v1(7.54,77.85) v1(7.54,68.32) v1(7.54,65.78) v1(7.54,63.24) v1(8.3,95.09) v1(8.45,49.37) v1(8.81,91.18) v1(9.83,74.67) v1(10.08,85.47) v1(10.08,82.93) v1(10.84,95.09) v1(11.35,54.86) v1(11.35,52.32) v1(11.98,91.18) v1(11.98,88.77) v1(13.38,95.09) v1(13.67,63.01) v1(13.89,54.86) v1(13.89,52.32) v1(14.02,57.27) v1(14.78,71.75) v1(14.78,49.4) v1(16.05,51.43) v1(16.21,63.01) v1(18.61,49.37) v1(19.26,62.89) v1(21.15,51.4) v1(21.15,49.37) v1(23.69,51.4) v1(23.69,49.37) v1(25.57,84.2) v1(26.23,51.4) v1(26.23,49.37) v1(27.61,84.2) v1(28.77,51.4) v1(28.77,49.37) v1(31.31,51.4) v1(31.31,49.37) v1(33.85,49.37) v1(34.59,95.09) v1(36.37,51.3) v1(36.39,49.37) v1(37.13,95.09) v1(38.27,53.21) v1(38.93,49.37) v1(39.29,51.3) v1(39.67,95.09) v1(41.83,93.72) v1(42.21,95.09) v1(43.73,93.72) v1(44.75,95.09) v1(45.64,93.72) v1(45.64,91.44) v1(47.29,95.09) v1(48.56,93.72) v1(48.56,91.31) v1(49.83,95.09) v1(52.37,95.09) v1(52.37,93.47) v1(53.77,91.94) v1(54.91,95.09) v1(55.16,93.06) v1(57.45,95.09) v1(57.7,93.06) v1(58.34,71.75) v1(59.99,95.09) v1(62.53,95.09) v1(63.8,87.88) v1(65.07,95.09) v1(68.12,73.53) v1(68.12,70.1) v1(70.15,95.09) v1(70.15,92.93) v1(72.69,95.09) v1(72.69,92.93) v1(74.11,92.04) v1(74.11,89.5) v1(74.11,86.96) v1(74.11,84.42) v1(74.11,81.88) v1(74.11,79.34) v1(74.11,76.8) v1(74.11,74.26) v1(74.11,71.72) v1(74.11,69.18) v1(74.11,66.64) v1(74.11,64.1) v1(74.11,61.56) v1(74.11,59.02) v1(74.11,56.48) v1(74.11,53.94) v1(74.11,51.4) v1(74.11,48.86)
VCC-1V8: length 80.6
  TOP w1.016: 53.3,59.73 53.39,59.81 55.67,59.81 56.31,60.45 61.01,60.45 62.53,58.92 63.99,58.92 66.47,56.45 66.47,55.11 67.64,53.95 U2.29 ; U3.6 13.05,66.75 15.41,64.39 v1(32.3,64.39) 33.7,64.39 36.88,61.21 v1(36.88,57.76) v1(36.88,56.64)
  PWR03 w1.016: 51.99,59.81 51.74,59.81 50.08,58.16 40.94,58.16 39.29,56.51 38.02,56.51
  BOTTOM w0.508: v1(32.3,64.39) 32.3,66.04 31.54,66.8 31.54,68.96 36.11,73.53 37.09,73.53 R16.2
  vias: v1(52.88,59.43) v1(53.64,59.94)
VCC-3V3: length 147.9
  TOP w0.508: v1(17.19,68.7) 17.19,70.61 v1(18.97,72.39) v1(36.37,72.39) ; v1(57.58,66.54) 57.49,66.64 D7.A 57.49,67.94 58.21,67.94 v1(59.36,69.08) 60.24,69.97 60.24,71.24 63.04,74.04 63.04,79.12 63.55,79.63 v1(64.05,79.63)
  BOTTOM w0.254: v1(64.05,79.63) 63.42,79.63 62.78,80.26 55.8,80.26 55.11,79.57 R53.2
  BOTTOM w0.305: R57.2 55.62,50.11 56.46,49.27 67.1,49.27 70.4,52.57 70.4,57.81 U2.25
  BOTTOM w0.381: v1(59.36,69.08) 59.41,69.14 R42.1 ; C50.2 21.13,57.15 21.41,56.87 U10.9 ; C50.2 21.94,58.75 v1(22.02,58.67) ; C50.2 v1(20.37,58.75) C49.2 19.6,56.3 19.31,56 U10.6 ; v1(64.05,79.63) 64.47,80.05 R17.1 ; R73.2 8.81,59.43 9.44,60.07 11.22,60.07 11.86,60.7 13.89,60.7 14.65,61.46 21.64,61.46 v1(22.4,62.23) ; v1(18.97,72.39) 18.97,76.83 17.7,78.1 17.7,79.83 R2.2 ; v1(60.5,62.99) 59.61,62.1 R46.2 ; v1(22.4,61.08) 22.91,60.58 R69.1 ; R40.1 64.82,62.68 v1(64.82,62.99) ; R74.2 9.12,80.21 8.72,79.81 8.72,78.07 8.99,77.8 R75.2 9.83,77.09 12.37,74.55 12.37,70.63 U3.4 ; R70.1 v1(24.3,60.83)
  BOTTOM w0.508: R15.2 v1(36.37,72.39)
  BOTTOM w1.016: U3.4 11.35,68.96 16.94,68.96 v1(17.19,68.7) 22.4,63.5 v1(22.4,62.23)
VCC-5V: length 124.5
  TOP w0.508: v1(35.48,81.91) 37.13,81.91 38.02,82.8 v1(39.29,82.8) ; FB1.2 54.51,79.12 v1(53.37,80.25) ; v1(33.07,73.28) 12.47,73.28 U3.2
  TOP w1.016: 38.65,59.18 38.65,61.85 34.46,66.04 16.81,66.04 U3.2 ; 54.02,61.72 54.02,62.48 54.91,63.37 58.09,63.37 59.48,61.97 63.8,61.97 64.82,60.96 64.82,60.07 68.4,56.49 U2.27
  BOTTOM w0.508: v1(33.07,73.28) 34.72,74.93 FB2.2 35.17,79.32 35.35,79.5 35.48,79.63 v1(35.48,81.91) ; v1(53.37,80.25) 52.75,79.63 40.31,79.63 39.29,80.64 v1(39.29,82.8)
  BOTTOM w1.016: 39.29,57.65 40.05,58.42 49.45,58.42 52.24,61.21 v1(52.5,61.21)
  vias: v1(38.27,58.16) v1(39.29,58.16) v1(53.51,61.21)
VCC-CARD: length 32.5
  TOP w0.381: v1(61.51,89.4) 58.47,86.36 v1(58.47,85.34) 59.14,84.67 61.93,84.67 v1(62.66,83.94)
  BOTTOM w0.381: v1(61.51,89.4) 61.51,89.66 61.13,90.04 R62.1 ; SU1.4 47.84,81.95 50.59,84.71 57.83,84.71 v1(58.47,85.34) C48.2 ; R17.2 62.02,81.15 61.77,80.9 R65.1 R63.1 R61.1 61.64,82.93 v1(62.66,83.94)
AKEY: length 24.8
  TOP w0.17: U2.10 70.35,77.97 68.88,77.97 68.37,78.48 67.86,78.48 64.82,75.43 64.82,72.51 63.29,70.99 63.29,65.4 62.91,65.02 v1(62.91,64.13)
  BOTTOM w0.17: v1(62.91,64.13) 60.42,64.13 R47.2
CPVDD: length 23.2
  TOP w0.203: v1(44.75,67.94) 44.71,67.98 U1.36 ; v1(41.07,73.53) 41.07,73.18 41.33,72.92 U1.22 ; U1.15 44.71,75.53 v1(44.75,75.56)
  BOTTOM w0.508: R16.1 40.69,73.91 v1(41.07,73.53) 41.13,73.59 C6.1 42.27,73.59 43.86,75.18 44.24,75.18 44.62,75.56 v1(44.75,75.56) 45.06,75.56 45.57,75.05 C20.2 45.73,74.42 46.72,73.43 48.31,73.43 48.81,72.92 48.81,71.75 45.89,68.83 C21.2 45.44,68.63 v1(44.75,67.94)
DKEY1: length 16.5
  TOP w0.17: U2.7 68.35,81.89 66.09,79.63 66.09,77.97 63.8,75.69 63.8,73.28 61.26,70.74 v1(61.26,69.97)
  BOTTOM w0.17: R44.1 v1(61.26,69.97)
DKEY2: length 25.1
  TOP w0.17: v1(62.02,63.12) 62.02,65.02 62.78,65.78 62.78,71.24 64.31,72.77 64.31,75.56 67.23,78.48 67.23,79.88 67.86,80.51 69.64,80.51 71.01,81.89 U2.8
  BOTTOM w0.17: R45.1 v1(62.02,63.12)
DMIC_CLK: length 41.3
  TOP w0.17: U2.11 67.97,76.81 66.09,74.93 66.09,62.39 66.65,61.83 66.65,60.89 66.47,60.7 v1(66.47,60.7)
  BOTTOM w0.17: v1(66.47,60.7) 66.34,60.57 66.34,59.03 66.6,58.77 66.6,52.7 65.01,51.12 61.43,51.12 60.5,52.05 60.5,52.7 59.8,53.4 55.87,53.4 55.67,53.59 R58.1
DMIC_DATA: length 43.3
  TOP w0.17: v1(67.48,59.56) 67.54,59.61 67.54,60.07 67.54,60.71 67.54,62.19 67.36,62.37 67.36,74.42 68.31,75.37 70.29,75.37 U2.12
  BOTTOM w0.17: v1(67.48,59.56) 67.55,59.49 67.55,58.78 67.55,51.75 66.03,50.24 61,50.24 58.79,52.45 54.07,52.45 R59.1
DMICCLK: length 61.7
  TOP w0.203: 45.11,68.4 U1.37
  TOP w0.254: 45.11,68.4 45.11,68.34 45.28,68.17 45.28,64.54 43.1,62.35 43.1,56.6 41.45,54.94 41.45,53.34 41.19,53.08 v1(41.07,53.08) 40.87,52.88 40.31,52.88 39.8,53.39 39.8,55.37 41.32,56.89 41.32,62.73 33.4,70.65 21.47,70.65 v1(21.26,70.86)
  BOTTOM w0.254: C4.1 22.02,76.65 22.34,76.33 22.34,71.05 22.02,70.74 21.38,70.74 v1(21.26,70.86) ; v1(41.07,53.08) 41.32,52.83 41.78,52.83 R38.1
DMICDAT: length 64.7
  TOP w0.203: U1.39 45.91,68.56
  TOP w0.254: v1(47.11,67.05) 47.11,67.36 45.91,68.56 ; v1(45.92,66.16) 45.79,66.04 45.79,64.33 43.61,62.14 43.61,56.38 41.96,54.73 41.96,52.96 v1(41.07,52.07) 40.76,52.37 40.1,52.37 39.29,53.18 39.29,55.58 40.81,57.1 40.81,62.52 33.19,70.14 21.55,70.14 v1(21.38,69.97)
  BOTTOM w0.254: v1(45.92,66.16) 46.15,66.16 47.04,67.05 v1(47.11,67.05) ; v1(21.38,69.97) 21.64,70.23 22.23,70.23 22.84,70.84 22.84,76.33 23.16,76.65 C7.1 ; R39.1 41.67,52.31 41.31,52.31 v1(41.07,52.07)
HBIAS: length 59.4
  TOP w0.17: 48.94,68.58 48.56,68.58 47.93,69.21 47.93,69.57 47.37,70.12 U1.2
  TOP w0.254: v1(19.45,79.03) 22.18,79.03 24.3,81.15 31.84,81.15 32.22,80.77 37.77,80.77 38.53,81.53 42.93,81.53 44.62,79.84 51.65,79.84 53.51,77.97 53.51,77.34 56.18,74.67 56.18,70.82 53.05,67.69 50.21,67.69 49.32,68.58 48.94,68.58
  BOTTOM w0.254: v1(19.45,79.03) C1.2 20.75,79.28 20.75,80.34 R1.2
HPOUTFB: length 48.5
  TOP w0.17: 42.52,75.77 42.72,75.56 42.72,75.44 43.51,74.65 U1.18
  TOP w0.254: J1.3 31.29,92.82 31.29,91.69 32.43,90.55 32.43,85.34 29.64,82.55 23.69,82.55 v1(22.98,83.26) ; v1(25.7,76.45) 25.95,76.2 34.46,76.2 34.69,76.43 37.74,76.43 38.02,76.7 39.8,76.7 40.43,76.07 42.21,76.07 42.52,75.77
  BOTTOM w0.254: v1(25.7,76.45) 25.7,76.83 24.25,78.28 C7.2 23.16,79.3 C5.1 22.98,79.48 C9.2 R10.2 D2.1 v1(22.98,83.26)
HPOUTL: length 24.4
  TOP w0.17: U1.17 43.91,74.75 43.23,75.44 43.23,75.68
  TOP w0.254: 43.23,75.68 43.23,76.07 41.58,77.72 36.75,77.72 36.47,77.44 33.7,77.44 33.47,77.21 27.61,77.21 v1(27.35,77.47)
  BOTTOM w0.254: R4.2 C16.2 26.34,78.48 v1(27.35,77.47)
HPOUTR: length 46.4
  TOP w0.17: U1.19 43.11,74.63 42.44,75.31 42.21,75.31
  TOP w0.254: v1(13.64,84.2) 15.29,82.55 15.29,76.7 17.06,74.93 35.86,74.93 36.34,75.41 42.11,75.41 42.21,75.31
  BOTTOM w0.254: R6.2 C15.2 14.78,90.35 14.52,90.09 14.52,85.09 v1(13.64,84.2)
HS-MIC: length 19.5
  TOP w0.254: J1.4 19.6,94.41 18.97,93.77 18.97,84.58 20.37,83.18 v1(21.64,83.18)
  BOTTOM w0.254: v1(21.64,83.18) 21.82,83 D4.1 C10.2 R1.1 21.82,79.52 C5.2 22.02,79.32 C4.2
I2S_BCLK: length 42.9
  TOP w0.17: U1.29 41.34,70.12 40.31,69.08 v1(39.22,69.08)
  BOTTOM w0.17: U2.14 70.35,72.89 58.59,72.89 57.43,71.73 57.43,71.27 56.63,70.47 53.38,70.47 47.93,65.02 47.04,65.02 46.66,64.64 45,64.64 44.62,65.03 41.44,65.03 39.22,67.25 v1(39.22,69.08)
I2S_DI: length 43.1
  TOP w0.17: v1(40.56,70.74) 40.74,70.92 U1.27
  BOTTOM w0.17: U2.15 69.08,71.62 65.2,71.62 64.69,72.13 59.52,72.13 57.24,69.85 53.86,69.85 47.91,63.89 41.31,63.89 38.02,67.18 38.02,69.47 38.72,70.17 39.99,70.17 v1(40.56,70.74)
I2S_DO: length 47.9
  TOP w0.17: v1(39.29,70.74) 39.8,70.74 40.38,71.32 U1.26
  BOTTOM w0.17: v1(39.29,70.74) 38.53,70.74 37.51,69.72 37.51,67.05 41.1,63.47 48.08,63.47 54.03,69.41 57.4,69.41 59.62,71.62 64.44,71.62 64.94,71.12 67.99,71.12 68.63,70.48 70.48,70.48 U2.16
I2S_LRCLK: length 48.6
  TOP w0.17: v1(36.75,70.74) 37.77,69.72 40.31,69.72 41.1,70.52 U1.28
  BOTTOM w0.17: v1(36.75,70.74) 36.5,70.48 36.5,66.8 40.43,62.86 48.43,62.86 54.4,68.83 57.45,68.83 59.74,71.12 64.18,71.12 64.69,70.61 66.72,70.61 68.14,69.19 U2.17
I2S_MCLK: length 37.8
  TOP w0.17: U1.30 41.63,69.72 41.19,69.29 v1(41.19,69.21)
  BOTTOM w0.17: v1(41.19,69.21) 40.26,68.28 40.26,67.48 42.08,65.66 44.88,65.66 45.4,65.14 46.43,65.14 46.95,65.66 47.42,65.66 48.18,66.42 48.18,67.56 52.33,71.71 56.12,71.71 58.32,73.91 62.53,73.91 63.17,74.55 68.91,74.55 U2.13
IR-RX: length 71
  TOP w0.17: v1(32.69,67.81) 32.18,68.32 v1(21.76,68.32)
  BOTTOM w0.17: U2.18 70.48,67.94 68.5,67.94 67.74,67.18 58.72,67.18 58.12,67.78 54.51,67.78 48.43,61.7 39.18,61.7 33.07,67.81 v1(32.69,67.81) ; R76.2 20.44,68.32 v1(21.76,68.32)
IR-TX: length 58.1
  TOP w0.17: v1(33.19,63.24) 32.18,62.23 24.68,62.23 22.27,59.81 v1(17.06,59.81)
  BOTTOM w0.17: v1(17.06,59.81) 16.94,59.94 R77.2 ; U2.19 69.16,66.67 58.59,66.67 57.91,67.35 54.68,67.35 48.61,61.28 38.59,61.28 36.62,63.24 v1(33.19,63.24)
IRQ-AUDIO: length 3.5
  TOP w0.17: U1.24 41.16,72.12 40.64,72.64 39.6,72.64 R7.2
JDET: length 32.3
  TOP w0.17: v1(26.46,67.69) 21.26,67.69 19.35,69.59 v1(19.35,70.48)
  BOTTOM w0.17: R2.1 16.94,80.19 16.94,77.47 17.95,76.45 17.95,71.88 v1(19.35,70.48) ; R29.1 26.46,63.44 v1(26.46,67.69)
  BOTTOM w0.203: R2.1 19.86,83.11 19.86,85.12 J1.5
LINEINL: length 59.9
  TOP w0.17: 48.76,69.67 47.51,70.92 U1.4
  TOP w0.254: 48.76,69.67 48.84,69.59 52.04,69.59 53.64,71.2 53.64,74.16 50,77.8 43.02,77.8 42.08,78.74 32.94,78.74 32.69,78.48 30.15,78.48 29.89,78.74 26.08,78.74 23.54,76.2 18.08,76.2 16.43,77.85 v1(16.43,81.6)
  BOTTOM w0.254: v1(16.43,81.6) 15.67,82.36 C31.2
